# Altium PCB PCB1.PcbDoc (part 1 of 2)
Units mm, origin at the board's own origin, x right, y up, seen from the top; angles counter-clockwise.
Board outline 75.44 x 70.87 mm, 4 copper layers (Top Layer, Int1 (GND), Int2 (PWR), Bottom Layer), stack 1.586 mm thick; 102 components, 83 nets, 334 pads, 73 vias.
Unrouted connection lines stored in the file: 199.
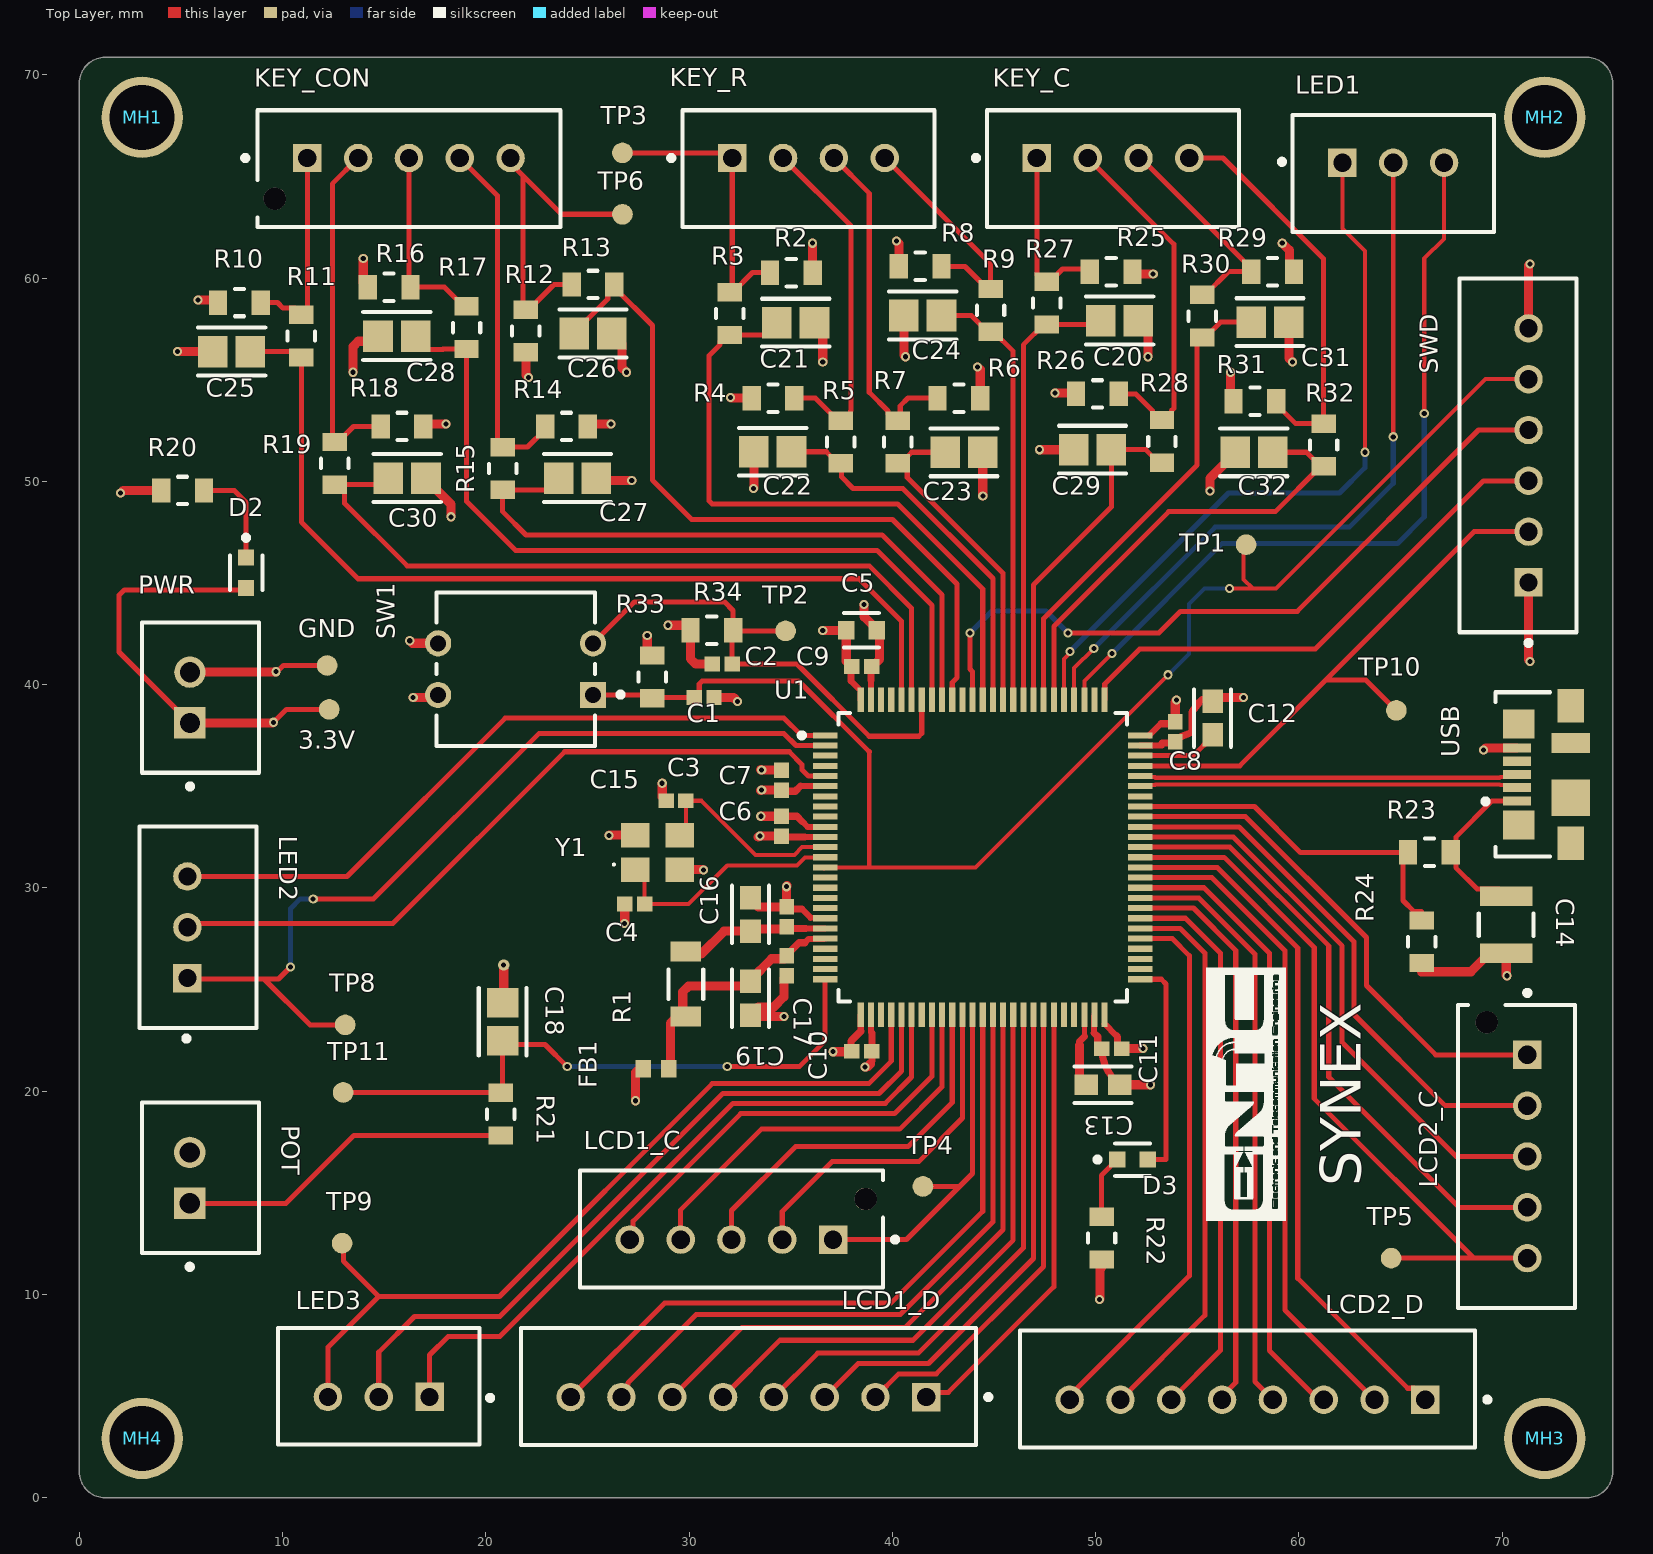
[diagram p0: Top Layer view]
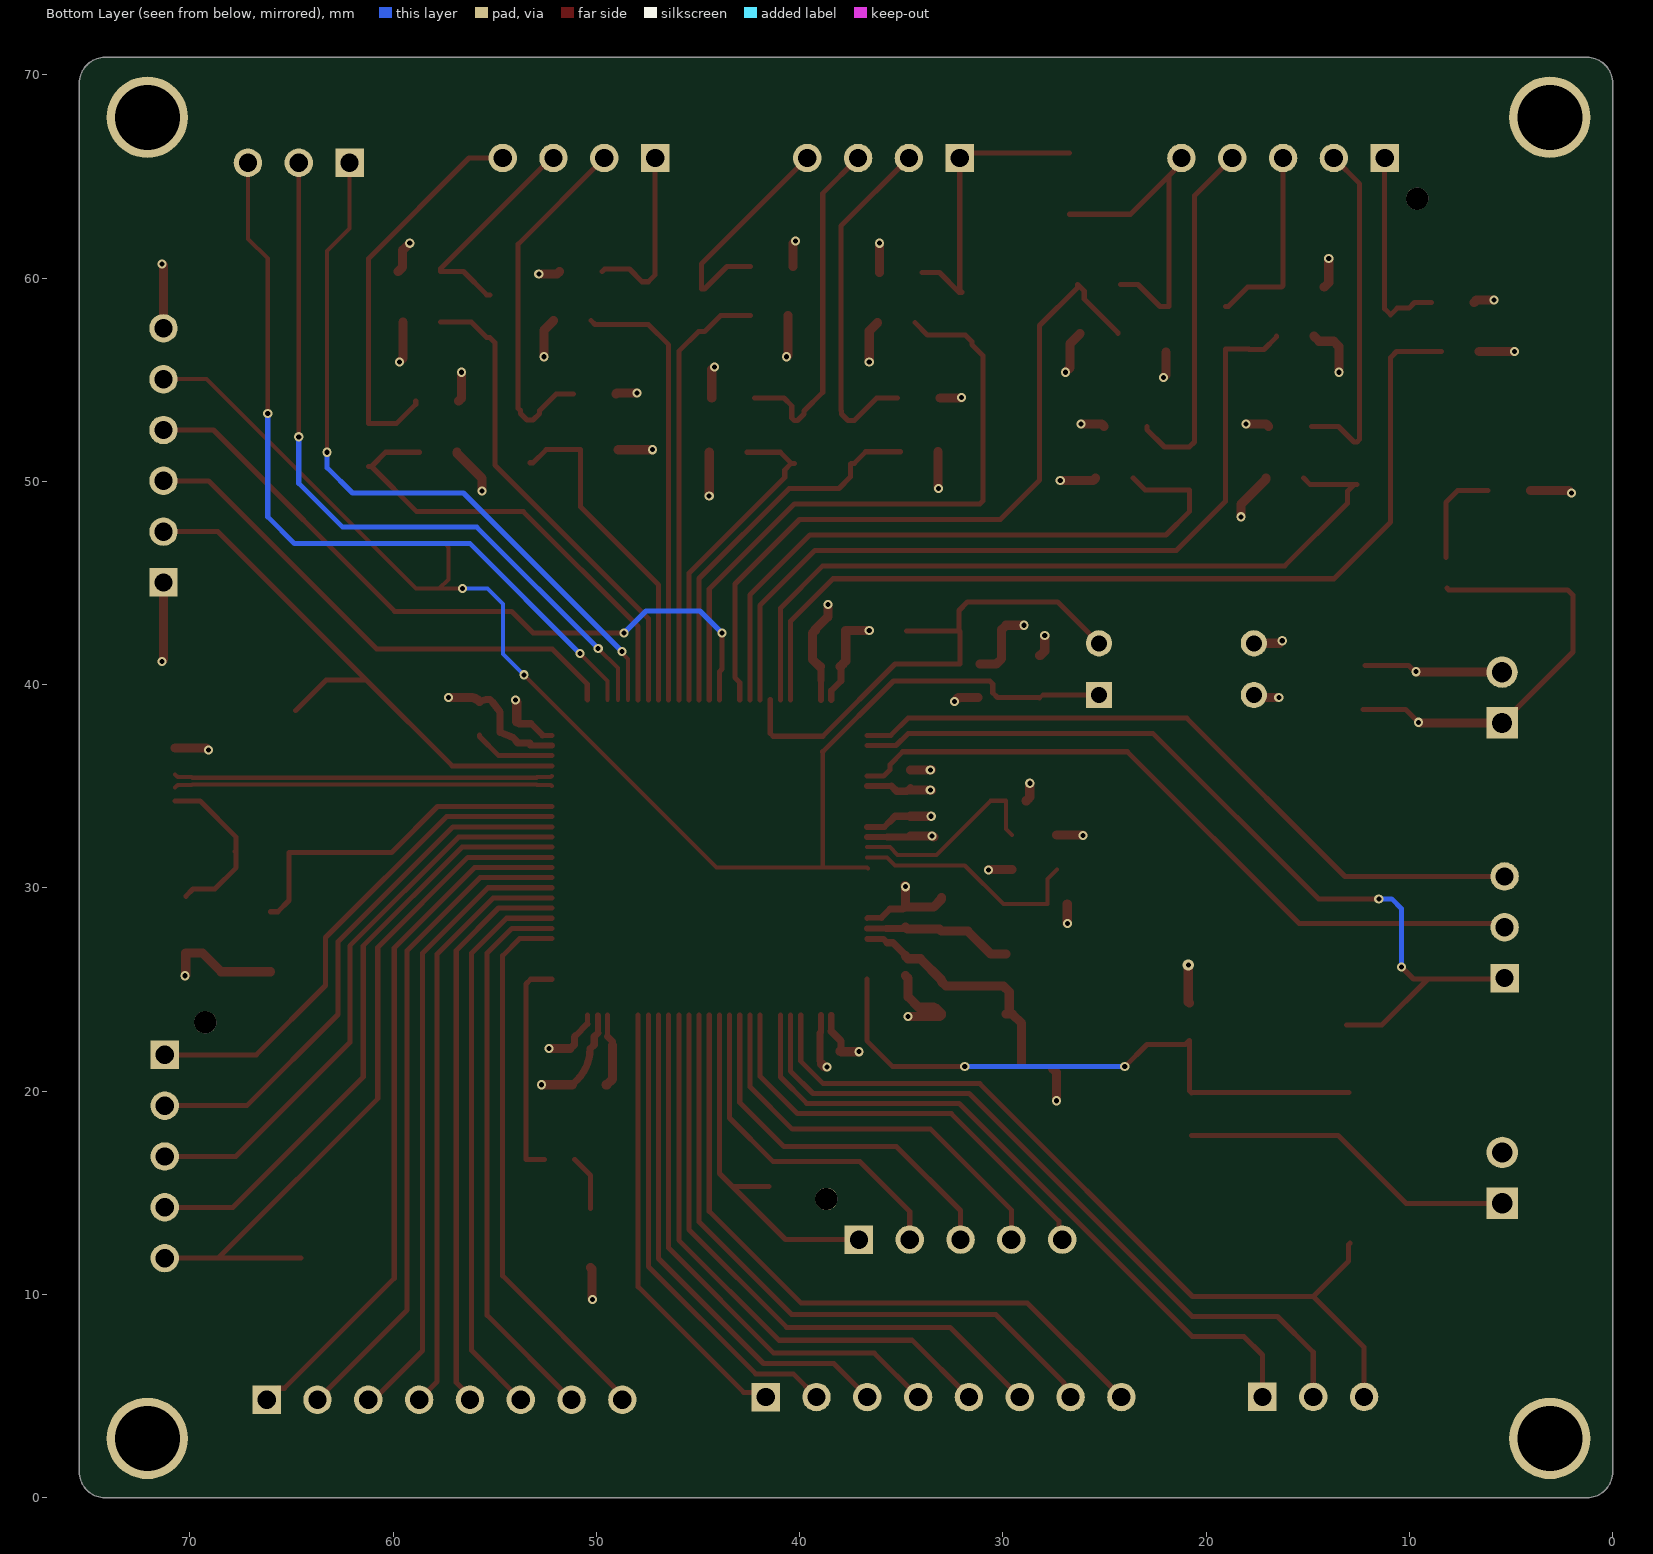
[diagram p1: Bottom Layer view, seen from below]
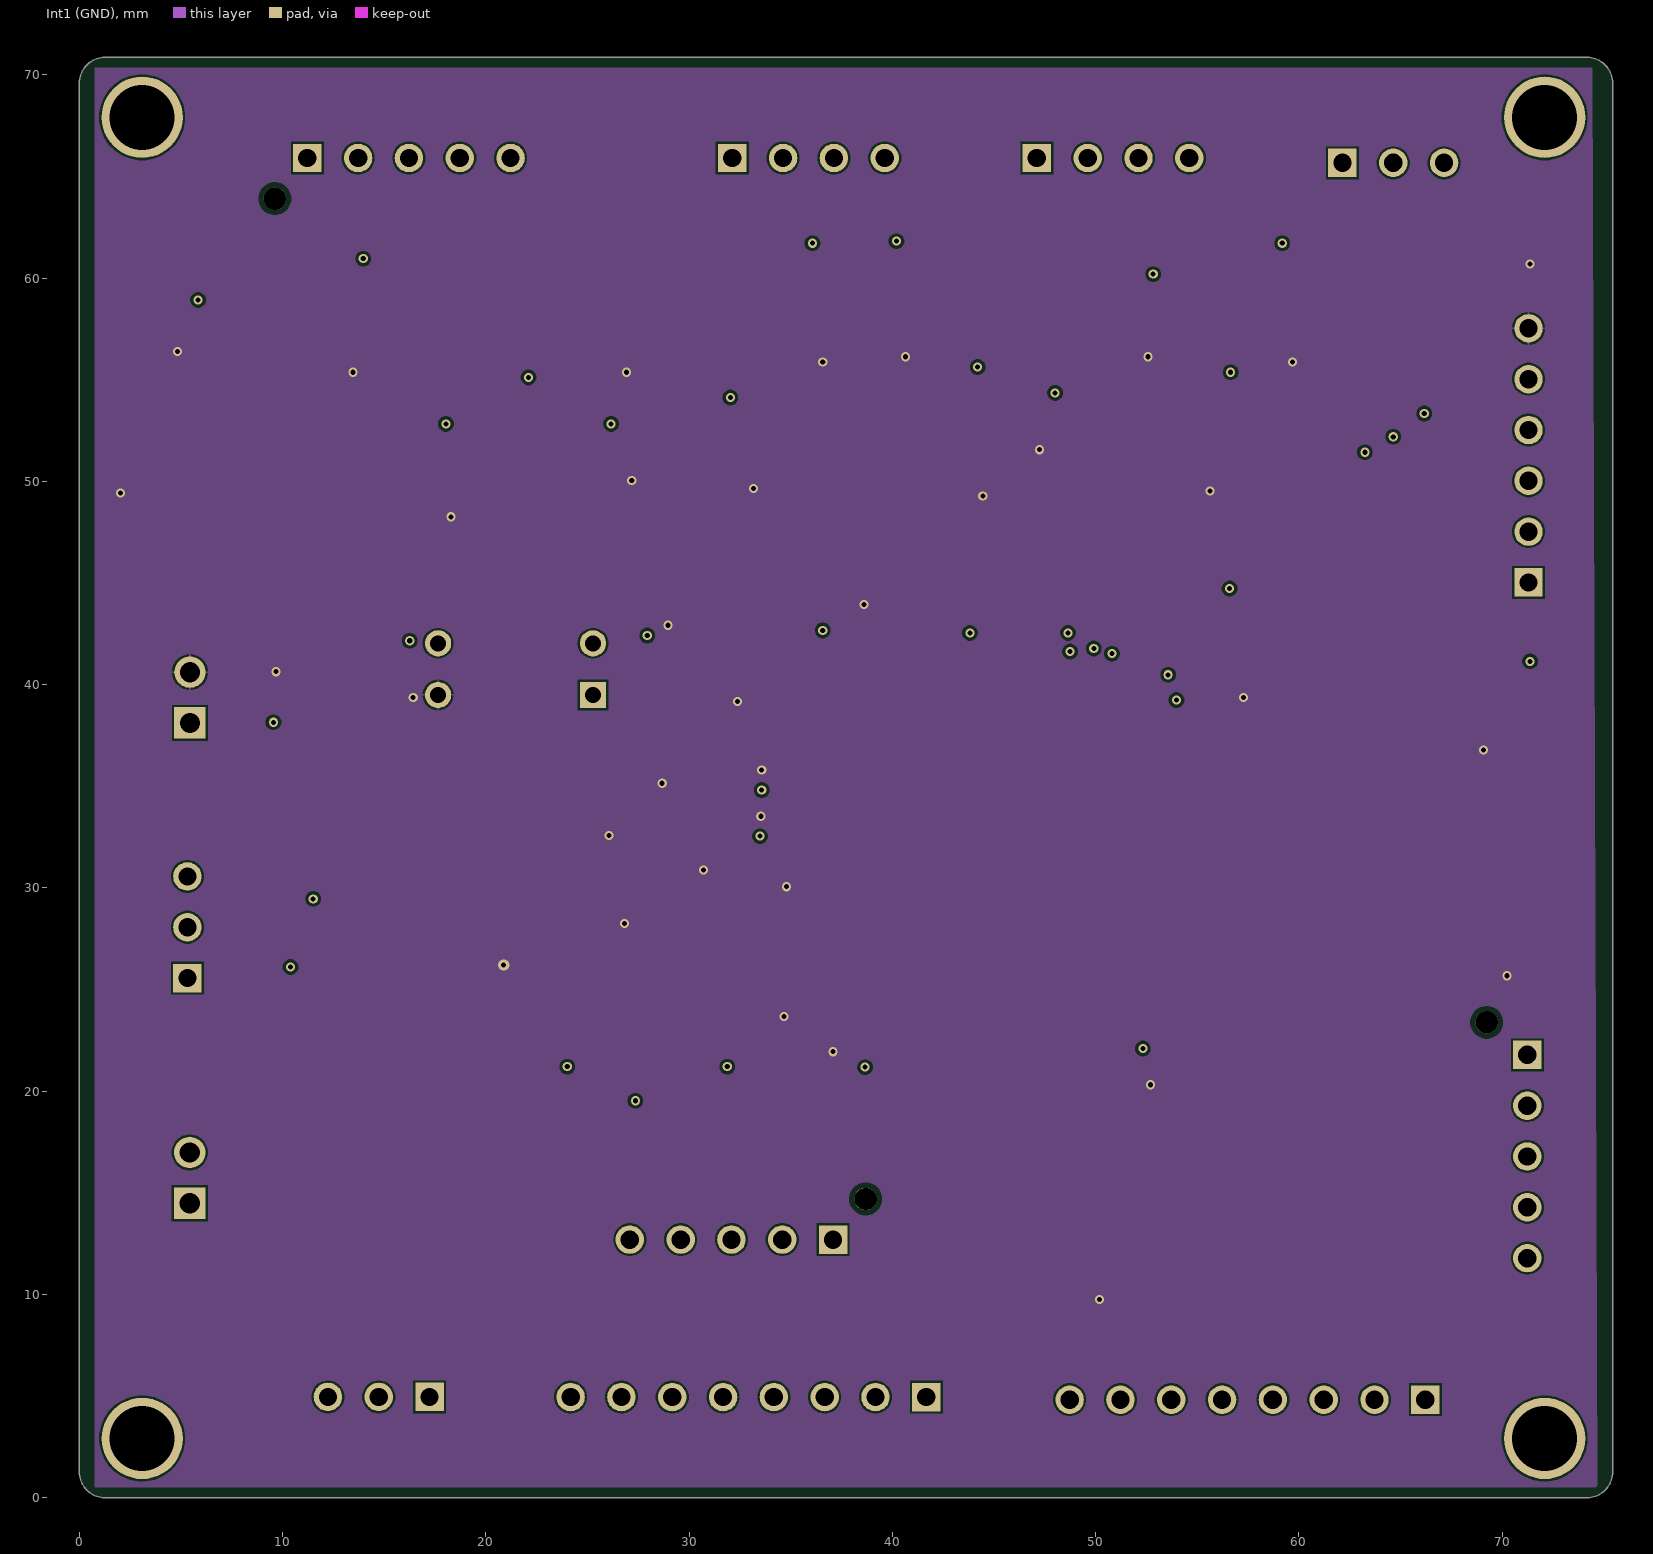
[diagram p2: Int1 (GND)]
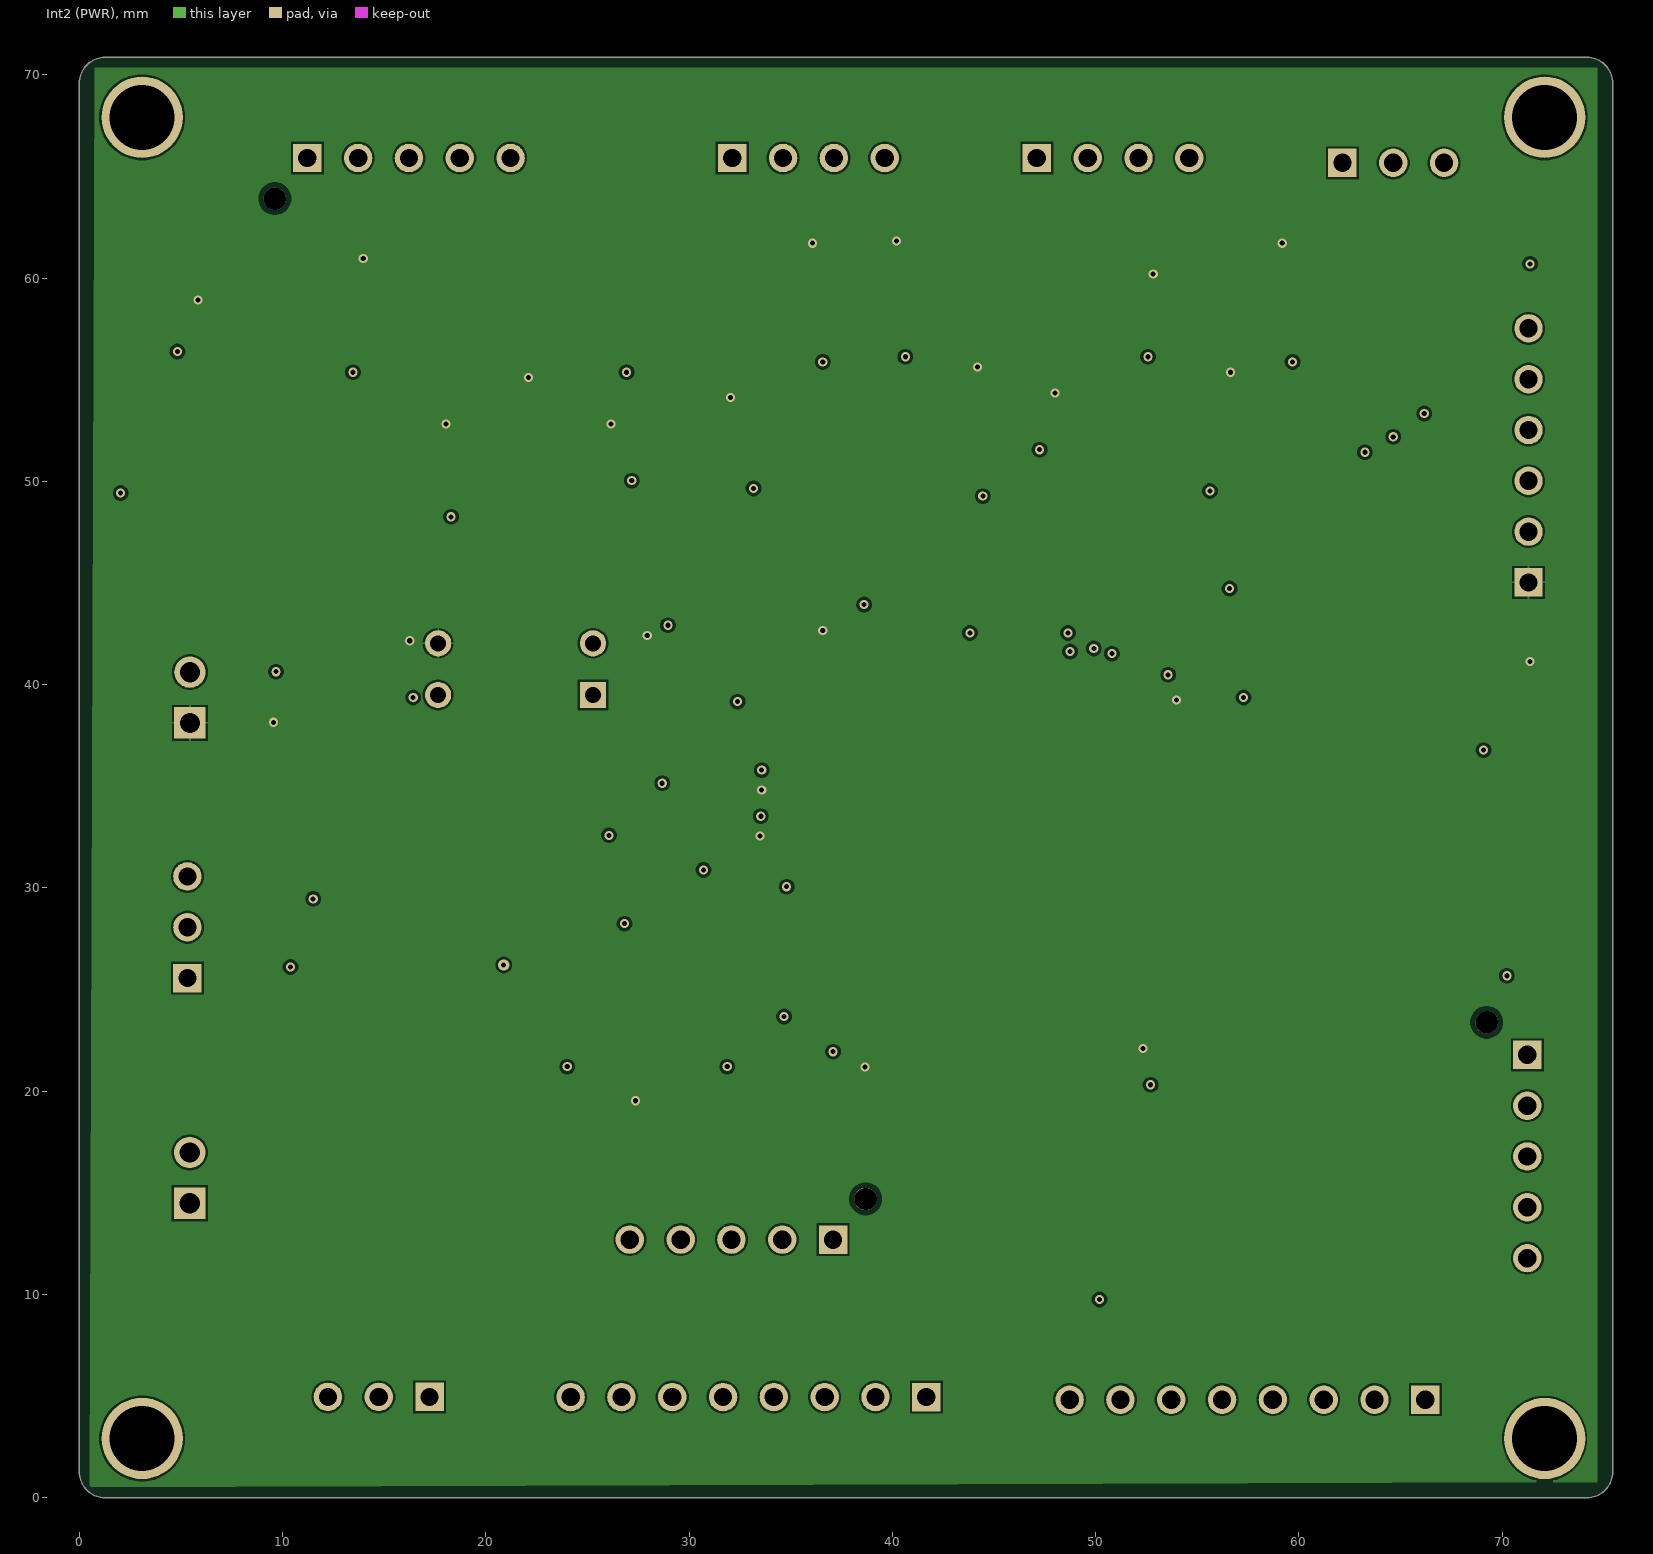
[diagram p3: Int2 (PWR)]
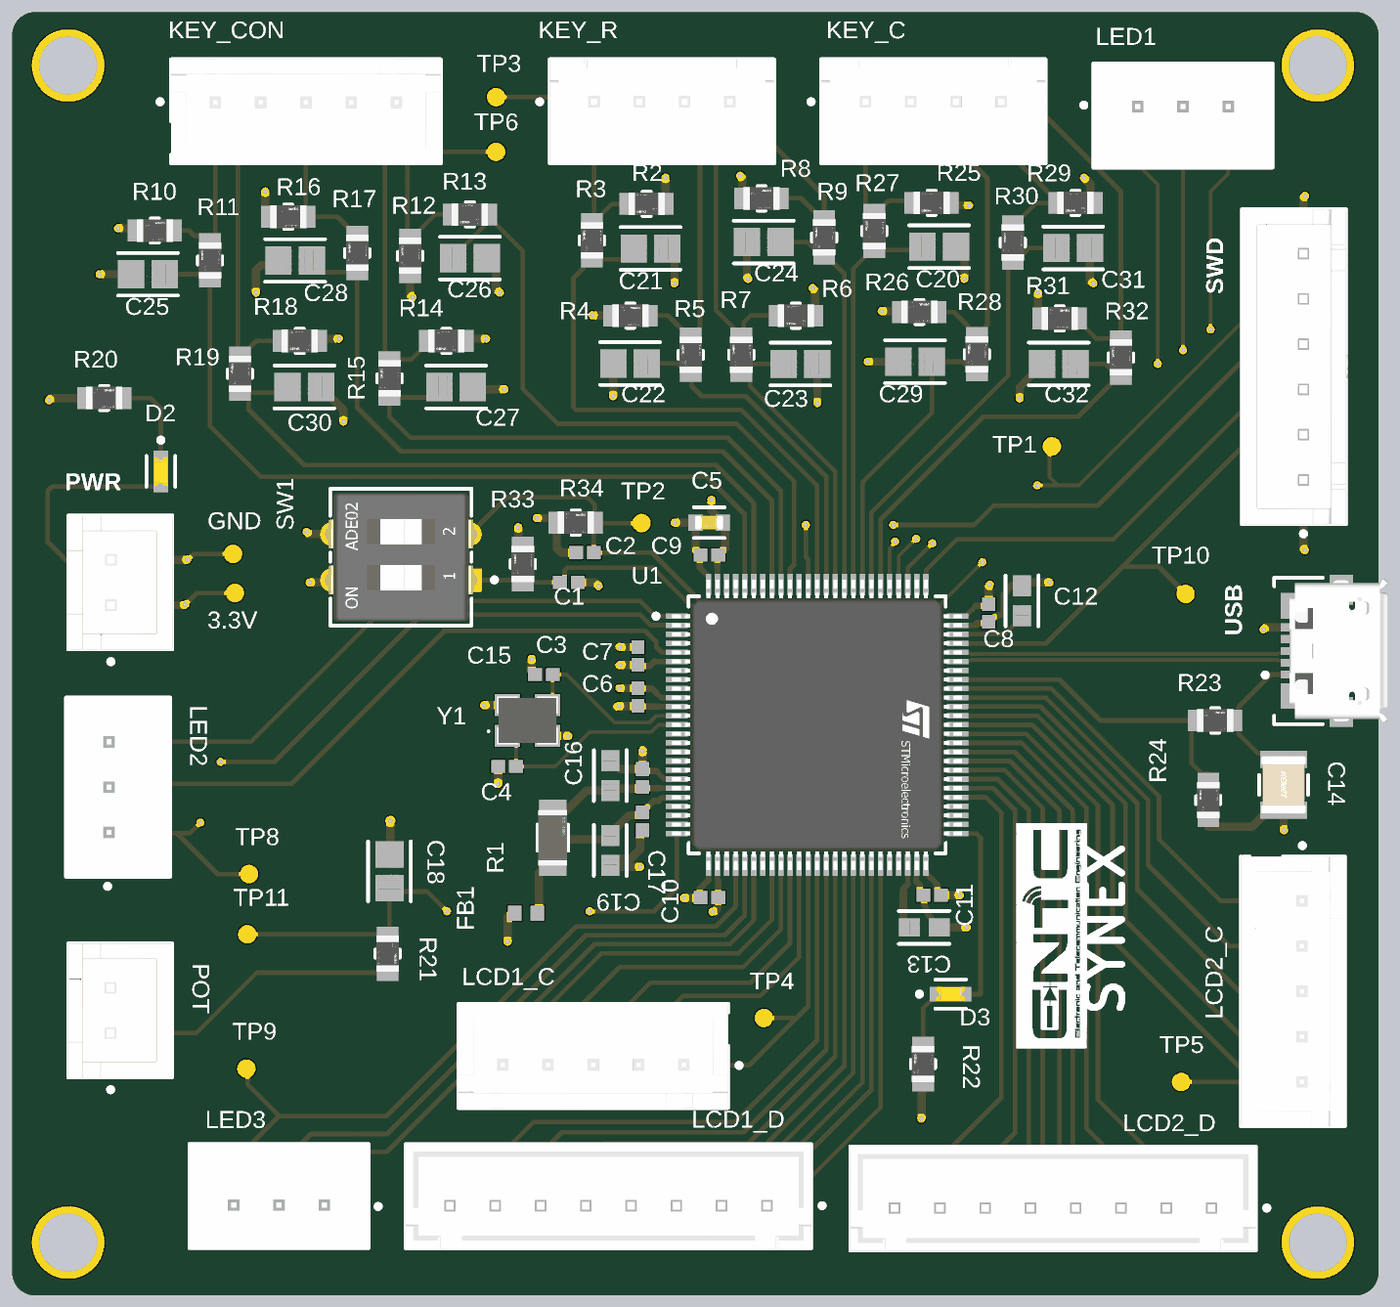
[diagram p4: 3D render of the assembled board from above, using the file's embedded part models]

## Layer stack, top to bottom
Top Solder: solder mask 0.0305, SM-001, Dk 3.8
Top Layer: signal copper 0.035
Dielectric 1: prepreg 0.2104, PP-7628, Dk 4.4
Int1 (GND): signal copper 0.0152
Dielectric 3: core 1.065, Core-039, Dk 4.6
Int2 (PWR): signal copper 0.0152
Dielectric 5: prepreg 0.2104, PP-7628, Dk 4.4
Bottom Layer: signal copper 0.035
Bottom Solder: solder mask 0.0305, SM-001, Dk 3.8

## Board outline
0,1.27 0,69.596 cw(c1.27,69.596) 1.27,70.866 74.168,70.866 cw(c74.168,69.596) 75.438,69.596 75.438,1.27 cw(c74.168,1.27) 74.168,0 1.27,0 cw(c1.27,1.27)

## Design rules (kind name [scope] priority, off if disabled: settings)
AssemblyTestpoint [All] p1: testpointundercomponent=TRUE minsize=2.54 maxsize=2.54 preferedsize=1.524 minholesize=0 maxholesize=1.016 preferedholesize=0 testpointgrid=0.05 usegrid=TRUE gridtolerance=0 allowsidebottom=TRUE minspacing=25
BoardOutlineClearance [All] p1: gap=0.2 ignorepadtopadclearanceinfootprint=FALSE
Clearance [All] p1: gap=0.102 ignorepadtopadclearanceinfootprint=FALSE except(0.127: Arc-Via Track-Via SMDPad-Via THPad-Via Via-Via Via-Fill Via-Poly Via-Region Via-Text; 0.25: Arc-Hole Track-Hole SMDPad-Hole THPad-Hole Via-Hole Fill-Hole Poly-Hole Region-Hole Text-Hole)
ComponentClearance [All] p1: gap=0.102 collisioncheckmode=3 verticalgap=0.102 showdistances=TRUE
DiffPairsRouting [All] p1: maxlimit=0.127 minlimit=0.127 mostfreqgap=0.127 toplayer_minwidth=0.2 toplayer_maxwidth=0.2 toplayer_prefwidth=0.2 midlayer1_minwidth=0.154 midlayer1_maxwidth=0.154 midlayer1_prefwidth=0.154 midlayer2_minwidth=0.154 midlayer2_maxwidth=0.154 midlayer2_prefwidth=0.154 bottomlayer_minwidth=0.2 bottomlayer_maxwidth=0.2 bottomlayer_prefwidth=0.2 impedanceprofiledriven=TRUE impedanceprofileid={82063DBE-4F28-4A8A-9398-9A70FBDED7CD} impedanceprofilevalue=90.000000 maxuncoupledlength=12.7
Height [All] p1: minheight=0 maxheight=1816.048 prefheight=12.7
HoleSize [All] p1: absolutevalues=TRUE maxlimit=6.3 minlimit=0.2 maxpercent=80.000 minpercent=20.000
HoleToHoleClearance [All] p1: gap=0.25 allowstackedmicrovias=FALSE
MinimumAnnularRing [All] p1: minimumring=0.076
MinimumSolderMaskSliver [All] p1: minsoldermaskwidth=0
PlaneClearance [All] p1: clearance=0.102
PlaneConnect PlaneConnectPowerPads [InPadClass('PowerPads')] p1: planeconnectstyle=Direct reliefexpansion=0.508 reliefentries=4 reliefconductorwidth=0.254 reliefairgap=0.254
PlaneConnect [All] p2: pad.planeconnectstyle=Relief pad.reliefexpansion=0.3 pad.reliefentries=4 pad.reliefconductorwidth=0.102 pad.reliefairgap=0.102 via.planeconnectstyle=Direct via.reliefexpansion=0.3 via.reliefentries=4 via.reliefconductorwidth=0.127 via.reliefairgap=0.127
PolygonConnect PolygonConnectPowerPads [All vs (InPadClass('PowerPads'))] p1: connectstyle=Direct reliefconductorwidth=0.254 reliefentries=4 polygonreliefangle="90 Angle" airgapwidth=0.254
PolygonConnect [All] p2: thpad.connectstyle=Relief thpad.reliefconductorwidth=0.102 thpad.reliefentries=4 thpad.polygonreliefangle="90 Angle" thpad.airgapwidth=0.102 smdpad.connectstyle=Relief smdpad.reliefconductorwidth=0.102 smdpad.reliefentries=4 smdpad.polygonreliefangle="90 Angle" smdpad.airgapwidth=0.102 via.connectstyle=Direct via.reliefconductorwidth=0.127 via.reliefentries=4 via.polygonreliefangle="90 Angle" via.airgapwidth=0.127
RoutingVias [All] p1: holewidth=0.25 width=0.45 viastyle="Through Hole" minholewidth=0.2 minwidth=0.45 maxholewidth=6.3 maxwidth=6.55
SilkToSilkClearance [All] p1: silktosilkclearance=0
SilkToSolderMaskClearance [IsPad] p1: minsilkscreentomaskgap=0.102 clearancetoexposedcopper=TRUE
SolderMaskExpansion [All] p1: expansion=0.075 istentingtop=FALSE
SupplyNets "Schematic Supply Nets_2" [InNet('GND')] p1: voltage=0.000
SupplyNets "Schematic Supply Nets_1" [InNet('+5V')] p2: voltage=0.000
SupplyNets "Schematic Supply Nets" [InNet('+3.3V')] p3: voltage=0.000
Width [All] p1: maxlimit=1816.048 minlimit=0.102 preferedwidth=0.25 midlayer1_prefwidth=0.102 midlayer2_prefwidth=0.102 minimp=50.000000 maximp=50.000000 favimp=50.000000
19 further rules are at their usual default settings.

## Classes and differential pairs
differential pair USBD: +USBD_P -USBD_N

## Components (designator, comment, footprint, x,y, rotation, side; value= is the part's Value field where it differs from the comment)
3.3V "TPAD6R" TP06R 12.294,38.786 r90 top
C1 "100nF" CAPC1050X55X23ML05T13 30.734,39.37 r180 top
C2 "100nF" CAPC1050X55X23ML05T13 31.623,41.021 r0 top
C3 "10pF" CAPC1050X55X23ML05T13 29.355,34.29 r180 top
C4 "10pF" CAPC1050X55X23ML05T13 27.323,29.21 r0 top
C5 "4.7uF" FP-CC0603-DA-MFG 38.481,42.672 r0 top value="4.7 uF"
C6 "100nF" CAPC1050X55X23ML05T13 34.544,33.038 r270 top
C7 "100nF" CAPC1050X55X23ML05T13 34.544,35.306 r270 top
C8 "100nF" CAPC1050X55X23ML05T13 53.915,37.686 r90 top
C9 "100nF" CAPC1050X55X23ML05T13 38.499,40.894 r180 top
C10 "100nF" CAPC1050X55X23ML05T13 38.499,21.971 r0 top
C11 "100nF" CAPC1050X55X23ML05T13 50.8,22.098 r0 top
C12 "2.2uF" FP-CL10-IPC_A 55.753,38.354 r90 top
C13 "2.2uF" FP-CL10-IPC_A 50.357,20.32 r0 top
C14 "2.2uF" FP-C1210C225K1RACAUTO-MFG 70.2,28.194 r270 top
C15 "100nF" CAPC1050X55X23ML05T13 34.798,28.575 r270 top
C16 "1uF" FP-CL10-IPC_A 33.02,28.702 r90 top
C17 "100nF" CAPC1050X55X23ML05T13 34.798,26.18 r90 top
C18 "100nF" FP-CL21-IPC_A 20.828,23.419 r90 top
C19 "1uF" FP-CL10-IPC_A 33.02,24.573 r270 top
C20 "100nF" FP-CL21-IPC_A 51.181,57.912 r0 top
C21 "100nF" FP-CL21-IPC_A 35.244,57.81 r0 top
C22 "100nF" FP-CL21-IPC_A 34.112,51.46 r180 top
C23 "100nF" FP-CL21-IPC_A 43.524,51.435 r0 top
C24 "100nF" FP-CL21-IPC_A 41.492,58.166 r180 top
C25 "100nF" FP-CL21-IPC_A 7.493,56.388 r180 top
C26 "100nF" FP-CL21-IPC_A 25.273,57.277 r0 top
C27 "100nF" FP-CL21-IPC_A 24.511,50.165 r0 top
C28 "100nF" FP-CL21-IPC_A 15.621,57.15 r180 top
C29 "100nF" FP-CL21-IPC_A 49.849,51.562 r180 top
C30 "100nF" FP-CL21-IPC_A 16.129,50.165 r0 top
C31 "100nF" FP-CL21-IPC_A 58.584,57.836 r0 top
C32 "100nF" FP-CL21-IPC_A 57.785,51.435 r180 top
D2 "LTST-C191GKT" FP-LTST-C191GKT-MFG 8.204,45.503 r270 top
D3 "LTST-C191GKT" FP-LTST-C191GKT-MFG 51.816,16.637 r0 top
FB1 "" RESC1609X55X30LL10T20 28.372,21.107 r0 top
GND "TPAD6R" TP06R 12.192,40.945 r90 top
KEY_C "B4B-XH-A(LF)(SN)" FP-B4B-XH-A_LF_SN-MFG 50.86,65.388 r180 top
KEY_CON "B5B-XH-AM(LF)(SN)" FP-B5B-XH-AM_LF_SN-MFG 16.216,65.388 r180 top
KEY_R "B4B-XH-A(LF)(SN)" FP-B4B-XH-A_LF_SN-MFG 35.874,65.388 r180 top
LCD1_C "B5B-XH-AM(LF)(SN)" FP-B5B-XH-AM_LF_SN-MFG 32.084,13.225 r0 top
LCD1_D "B8B-XH-A(LF)(SN)" FP-B8B-XH-A_LF_SN-MFG 32.92,5.478 r0 top
LCD2_C "B5B-XH-AM(LF)(SN)" FP-B5B-XH-AM_LF_SN-MFG 70.714,16.789 r90 top
LCD2_D "B8B-XH-A(LF)(SN)" FP-B8B-XH-A_LF_SN-MFG 57.471,5.351 r0 top
LED1 "B3B-XH-A(LF)(SN)" FP-B3B-XH-A_LF_SN-MFG 64.643,65.151 r0 top
LED2 "B3B-XH-A(LF)(SN)" FP-B3B-XH-A_LF_SN-MFG 5.842,28.067 r90 top
LED3 "B3B-XH-A(LF)(SN)" FP-B3B-XH-A_LF_SN-MFG 14.732,5.486 r180 top
MH1 "PTH" "Copy of PTH-M2D5X5"#1 3.09,67.916 r0 top
MH2 "PTH" "Copy of PTH-M2D5X5"#2 72.09,67.916 r0 top
MH3 "PTH" "Copy of PTH-M2D5X5"#3 72.09,2.916 r0 top
MH4 "PTH" "Copy of PTH-M2D5X5"#4 3.09,2.916 r0 top
POT "B2B-XH-A(LF)(SN)" FP-B2B-XH-A_LF_SN-MFG 5.958,15.737 r90 top
PWR "B2B-XH-A(LF)(SN)" FP-B2B-XH-A_LF_SN-MFG 5.969,39.37 r90 top
R1 "0Ω" FP-AC1206-MFG 29.845,25.273 r90 top value=267Ω
R2 "10kΩ" FP-SR0805-MFG 35.029,60.274 r180 top value=10KΩ
R3 "1kΩ" FP-SR0805-MFG 32.004,58.259 r90 top value=10KΩ
R4 "10kΩ" FP-SR0805-MFG 34.129,54.102 r0 top value=10KΩ
R5 "1kΩ" FP-SR0805-MFG 37.465,51.943 r90 top value=10KΩ
R6 "10kΩ" FP-SR0805-MFG 43.273,54.102 r180 top value=10KΩ
R7 "1kΩ" FP-SR0805-MFG 40.259,51.943 r90 top value=10KΩ
R8 "10kΩ" FP-SR0805-MFG 41.368,60.579 r0 top value=10KΩ
R9 "1kΩ" FP-SR0805-MFG 44.831,58.42 r90 top value=10KΩ
R10 "10kΩ" FP-SR0805-MFG 7.874,58.801 r0 top value=10KΩ
R11 "1kΩ" FP-SR0805-MFG 10.922,57.15 r90 top value=10KΩ
R12 "10kΩ" FP-SR0805-MFG 21.971,57.404 r90 top value=10KΩ
R13 "1kΩ" FP-SR0805-MFG 25.273,59.69 r180 top value=10KΩ
R14 "10kΩ" FP-SR0805-MFG 23.969,52.705 r180 top value=10KΩ
R15 "1kΩ" FP-SR0805-MFG 20.828,50.639 r90 top value=10KΩ
R16 "10kΩ" FP-SR0805-MFG 15.24,59.563 r0 top value=10KΩ
R17 "1kΩ" FP-SR0805-MFG 19.05,57.565 r90 top value=10KΩ
R18 "10kΩ" FP-SR0805-MFG 15.875,52.705 r180 top value=10KΩ
R19 "1kΩ" FP-SR0805-MFG 12.573,50.893 r90 top value=10KΩ
R20 "1kΩ" FP-SR0805-MFG 5.08,49.555 r0 top value=10KΩ
R21 "5.1kΩ" FP-SR0805-MFG 20.726,18.872 r270 top value=10KΩ
R22 "1kΩ" FP-SR0805-MFG 50.292,12.774 r90 top value=10KΩ
R23 "82kΩ" FP-SR0805-MFG 66.421,31.75 r0 top value=10KΩ
R24 "33kΩ" FP-SR0805-MFG 66.04,27.354 r90 top value=10KΩ
R25 "10kΩ" FP-SR0805-MFG 50.766,60.325 r180 top value=10KΩ
R26 "10kΩ" FP-SR0805-MFG 50.089,54.305 r0 top value=10KΩ
R27 "1kΩ" FP-SR0805-MFG 47.6,58.776 r90 top value=10KΩ
R28 "1kΩ" FP-SR0805-MFG 53.264,51.968 r90 top value=10KΩ
R29 "10kΩ" FP-SR0805-MFG 58.708,60.325 r180 top value=10KΩ
R30 "1kΩ" FP-SR0805-MFG 55.245,58.132 r90 top value=10KΩ
R31 "10kΩ" FP-SR0805-MFG 57.836,53.95 r0 top value=10KΩ
R32 "1kΩ" FP-SR0805-MFG 61.214,51.791 r90 top value=10KΩ
R33 "10kΩ" FP-SR0805-MFG 28.194,40.386 r90 top value=10KΩ
R34 "10kΩ" FP-SR0805-MFG 31.115,42.672 r0 top value=10KΩ
SW1 "1825057-1" FP-1825057-1-MFG 21.463,40.767 r90 top
SWD "B6B-XH-A(LF)(SN)" FP-B6B-XH-A_LF_SN-MFG 70.773,51.281 r90 top
TP1 "TPAD6R" TP06R 57.404,46.888 r90 top
TP2 "TPAD6R" TP06R 34.747,42.647 r90 top
TP3 "TPAD6R" TP06R 26.721,66.167 r0 top
TP4 "TPAD6R" TP06R 41.504,15.316 r0 top
TP5 "TPAD6R" TP06R 64.541,11.786 r0 top
TP6 "TPAD6R" TP06R 26.721,63.144 r0 top
TP8 "TPAD6R" TP06R 13.081,23.266 r90 top
TP9 "TPAD6R" TP06R 12.929,12.522 r0 top
TP10 "TPAD6R" TP06R 64.795,38.735 r90 top
TP11 "TPAD6R" TP06R 12.979,19.939 r90 top
U1 "STM32H743VIT6" FP-LQFP100-1L-MFG 44.445,31.509 r0 top
USB "47346-0001" FP-473460001-MFG 73.031,35.585 r90 top
Y1 "X322525MOB4SI" X322525MOB4SI 28.448,31.75 r0 top

## Footprints (in the part's own frame and the unit in brackets; to place one, negate y for a bottom-side part, rotate by r counter-clockwise, add the part's x,y. Pads: shape width x height; smd on the part's side, far side on the other; paste and mask are expansions set on the pad)
CAPC1050X55X23ML05T13 [mm] "Chip Capacitor, 2-Leads, Body 1.05x0.55mm, IPC Low Density"
  rect 0.76x0.72 smd: 1(-0.49,0) 2(0.49,0)
  body extent -0.53,-0.28 0.53,0.27, height 0.55
"Copy of PTH-M2D5X5"#1 [mm]
  round 4 hole 3.2: 1(0,0)
"Copy of PTH-M2D5X5"#2 [mm]
  round 4 hole 3.2: 4(0,0)
"Copy of PTH-M2D5X5"#3 [mm]
  round 4 hole 3.2: 3(0,0)
"Copy of PTH-M2D5X5"#4 [mm]
  round 4 hole 3.2: 2(0,0)
FP-1825057-1-MFG [mm]
  rect 1.29x1.29 hole 0.79 paste-2539.97 mask+0: 1(-1.27,-3.81)
  round 1.29 hole 0.79 paste-2539.97 mask+0: 2(1.27,-3.81) 3(1.27,3.81) 4(-1.27,3.81)
  silkscreen extent -3.78,-5.29 3.78,3.9, body extent -3.88,-4.55 3.88,4.55, height 0.25
FP-473460001-MFG [mm]
  rect 0.45x1.38 smd paste+0 mask+0: 1(-1.3,2.31) 2(-0.65,2.31) 3(0,2.31) 4(0.65,2.31) 5(1.3,2.31)
  rect 1.425x1.55 smd paste+0 mask+0: 6(-2.488,2.225) 7(2.488,2.225)
  rect 1.65x1.3 smd paste+0 mask+0: 8(-3.375,-0.35) 11(3.375,-0.35)
  rect 1.8x1.9 smd paste+0 mask+0: 9(-1.15,-0.35)
  rect 1x1.9 smd paste+0 mask+0: 10(1.55,-0.35)
  silkscreen extent -4.05,0.67 4.05,3.97, body extent -4.3,-2.48 4.3,3.45, height 0.25
FP-AC1206-MFG [mm]
  rect 1x1.5 smd paste+0 mask+0: 1(-1.6,0) 2(1.6,0)
  silkscreen extent -0.72,-0.85 0.72,0.85, body extent -2.2,-0.95 2.2,0.95, height 0.25
FP-B2B-XH-A_LF_SN-MFG [mm]
  rect 1.55x1.55 hole 1 paste-2539.97 mask+0: 1(-1.25,0.525)
  round 1.55 hole 1 paste-2539.97 mask+0: 2(1.25,0.525)
  silkscreen extent -4.5,-2.88 3.7,2.88, body extent -3.8,-2.98 3.8,2.98, height 0.25
FP-B3B-XH-A_LF_SN-MFG [mm]
  rect 1.4x1.4 hole 0.9 paste-2539.97 mask+0: 1(-2.5,0.525)
  round 1.4 hole 0.9 paste-2539.97 mask+0: 2(0,0.525) 3(2.5,0.525)
  silkscreen extent -5.6,-2.88 4.95,2.88, body extent -5.05,-2.98 5.05,2.98, height 0.25
FP-B4B-XH-A_LF_SN-MFG [mm]
  rect 1.4x1.4 hole 0.9 paste-2539.97 mask+0: 1(3.75,-0.525)
  round 1.4 hole 0.9 paste-2539.97 mask+0: 2(1.25,-0.525) 3(-1.25,-0.525) 4(-3.75,-0.525)
  silkscreen extent -6.2,-2.88 6.87,2.88, body extent -6.3,-2.98 6.3,2.98, height 0.25
FP-B5B-XH-AM_LF_SN-MFG [mm]
  rect 1.4x1.4 hole 0.9 paste-2539.97 mask+0: 1(5,-0.525)
  round 1.4 hole 0.9 paste-2539.97 mask+0: 2(2.5,-0.525) 3(0,-0.525) 4(-2.5,-0.525) 5(-5,-0.525)
  round 1.1 hole 1.1 unplated paste-2539.97 mask+0: ""(6.6,1.475)
  silkscreen extent -7.45,-2.88 8.17,2.88, body extent -7.55,-2.98 7.55,2.98, height 0.25
FP-B6B-XH-A_LF_SN-MFG [mm]
  rect 1.4x1.4 hole 0.9 paste-2539.97 mask+0: 1(-6.25,-0.525)
  round 1.4 hole 0.9 paste-2539.97 mask+0: 2(-3.75,-0.525) 3(-1.25,-0.525) 4(1.25,-0.525) 5(3.75,-0.525) 6(6.25,-0.525)
  silkscreen extent -9.35,-2.88 8.7,2.88, body extent -8.8,-2.98 8.8,2.98, height 0.25
FP-B8B-XH-A_LF_SN-MFG [mm]
  rect 1.4x1.4 hole 0.9 paste-2539.97 mask+0: 1(8.75,-0.525)
  round 1.4 hole 0.9 paste-2539.97 mask+0: 2(6.25,-0.525) 3(3.75,-0.525) 4(1.25,-0.525) 5(-1.25,-0.525) 6(-3.75,-0.525) 7(-6.25,-0.525) 8(-8.75,-0.525)
  silkscreen extent -11.2,-2.88 11.93,2.88, body extent -11.3,-2.98 11.3,2.98, height 0.25
FP-C1210C225K1RACAUTO-MFG [mm]
  rect 0.95x2.6 smd paste+0 mask+0: 1(-1.4,0) 2(1.4,0)
  silkscreen extent -0.55,-1.35 0.55,1.35, body extent -2,-1.45 2,1.45, height 0.25
FP-CC0603-DA-MFG [mm]
  rect 0.8x0.9 smd paste+0 mask+0: 1(-0.75,0) 2(0.75,0)
  silkscreen extent -0.85,-0.85 0.85,0.85, body extent -1.35,-0.75 1.35,0.75, height 0.25
FP-CL10-IPC_A [mm]
  rect 1.158x1.012 smd paste+0 mask+0: 1(-0.827,0) 2(0.827,0)
  silkscreen extent -1.41,-0.91 1.41,0.91, body extent -1.91,-1.01 1.91,1.01, height 0.25
FP-CL21-IPC_A [mm]
  rect 1.455x1.556 smd paste+0 mask+0: 1(-0.926,0) 2(0.926,0)
  silkscreen extent -1.65,-1.18 1.65,1.18, body extent -2.15,-1.28 2.15,1.28, height 0.25
FP-LQFP100-1L-MFG [mm]
  rect 1.2x0.3 smd paste+0 mask+0: 1(-7.75,6) 2(-7.75,5.5) 3(-7.75,5) 4(-7.75,4.5) 5(-7.75,4) 6(-7.75,3.5) 7(-7.75,3) 8(-7.75,2.5) 9(-7.75,2) 10(-7.75,1.5) 11(-7.75,1) 12(-7.75,0.5) 13(-7.75,0) 14(-7.75,-0.5) 15(-7.75,-1) 16(-7.75,-1.5) 17(-7.75,-2) 18(-7.75,-2.5) 19(-7.75,-3) 20(-7.75,-3.5) 21(-7.75,-4) 22(-7.75,-4.5) 23(-7.75,-5) 24(-7.75,-5.5) 25(-7.75,-6) 51(7.75,-6) 52(7.75,-5.5) 53(7.75,-5) 54(7.75,-4.5) 55(7.75,-4) 56(7.75,-3.5) 57(7.75,-3) 58(7.75,-2.5) 59(7.75,-2) 60(7.75,-1.5) 61(7.75,-1) 62(7.75,-0.5) 63(7.75,0) 64(7.75,0.5) 65(7.75,1) 66(7.75,1.5) 67(7.75,2) 68(7.75,2.5) 69(7.75,3) 70(7.75,3.5) 71(7.75,4) 72(7.75,4.5) 73(7.75,5) 74(7.75,5.5) 75(7.75,6)
  rect 0.3x1.2 smd paste+0 mask+0: 26(-6,-7.75) 27(-5.5,-7.75) 28(-5,-7.75) 29(-4.5,-7.75) 30(-4,-7.75) 31(-3.5,-7.75) 32(-3,-7.75) 33(-2.5,-7.75) 34(-2,-7.75) 35(-1.5,-7.75) 36(-1,-7.75) 37(-0.5,-7.75) 38(0,-7.75) 39(0.5,-7.75) 40(1,-7.75) 41(1.5,-7.75) 42(2,-7.75) 43(2.5,-7.75) 44(3,-7.75) 45(3.5,-7.75) 46(4,-7.75) 47(4.5,-7.75) 48(5,-7.75) 49(5.5,-7.75) 50(6,-7.75) 76(6,7.75) 77(5.5,7.75) 78(5,7.75) 79(4.5,7.75) 80(4,7.75) 81(3.5,7.75) 82(3,7.75) 83(2.5,7.75) 84(2,7.75) 85(1.5,7.75) 86(1,7.75) 87(0.5,7.75) 88(0,7.75) 89(-0.5,7.75) 90(-1,7.75) 91(-1.5,7.75) 92(-2,7.75) 93(-2.5,7.75) 94(-3,7.75) 95(-3.5,7.75) 96(-4,7.75) 97(-4.5,7.75) 98(-5,7.75) 99(-5.5,7.75) 100(-6,7.75)
  silkscreen extent -9.02,-7.1 7.1,7.1, body extent -8.45,-8.45 8.45,8.45, height 0.25
FP-LTST-C191GKT-MFG [mm]
  rect 0.8x0.8 smd paste+0 mask+0: 1(-0.75,0) 2(0.75,0)
  silkscreen extent -1.85,-0.8 0.85,0.8, body extent -1.25,-0.55 1.25,0.55, height 0.25
FP-SR0805-MFG [mm]
  rect 0.9x1.2 smd paste+0 mask+0: 1(-1.05,0) 2(1.05,0)
  silkscreen extent -0.23,-0.67 0.23,0.67, body extent -1.6,-0.77 1.6,0.77, height 0.25
RESC1609X55X30LL10T20 [mm] "Chip Resistor, 2-Leads, Body 1.60x0.85mm, IPC High Density"
  rect 0.75x0.85 smd: 1(-0.625,0) 2(0.625,0)
  body extent -0.85,-0.48 0.85,0.48, height 0.55
TP06R [mil] "Testpoint, round, d=0.6mm"
  round 40 smd paste-39.37: 1(0,0)
X322525MOB4SI [mm]
  rect 1.4x1.2 smd: 1(-1.1,-0.85) 2(1.1,-0.85) 3(1.1,0.85) 4(-1.1,0.85)
  silkscreen extent -2.2,-0.65 -2.1,-0.55, body extent -1.68,-1.33 1.68,1.33, height 0.9

## Part data
3.3V GND TP1 TP2 TP3 TP4 TP5 TP6 TP8 TP9 TP10 TP11: library part CMP-00028-00002-3, "0.6mm round", Pins=1
C1 C2 C7 C8 C9 C10 C11 C15 C17: library part CMP-2000-05439-1, "Chip Capacitor, 100 nF, +/- 10%, 16 V, -55 to 125 degC, 0402 (1005 Metric), RoHS, Tape and Reel", Capacitance=100000pF, Case Size/Dimension=0402, Dielectric=X7R, Manufacturer="Samsung Electro-Mechanics", Rated Voltage=16V, Tolerance (%)=±10%, Datasheet URL=https://datasheet.ciiva.com/29198/458718-da-01-en-vs-kondensator-0402-29198423.pdf, Datasheet Version=Nov-10, Manufacturer URL=http://www.samsungsem.com/global/index.jsp
C3 C4: library part CMP-2000-05439-1, "CL05C100JB5NNNC Chip Capacitor, 100 nF, +/- 10%, 16 V, -55 to 125 degC, 0402 (1005 Metric), RoHS, Tape and Reel", Capacitance=100000pF, Case Size/Dimension=0402, Dielectric=X7R, Manufacturer="Samsung Electro-Mechanics", Rated Voltage=16V, Tolerance (%)=±10%, Datasheet URL=https://datasheet.ciiva.com/29198/458718-da-01-en-vs-kondensator-0402-29198423.pdf, Datasheet Version=Nov-10, Manufacturer URL=http://www.samsungsem.com/global/index.jsp
C5: library part CMP-03422-001217-1, "CC0603KRX5R8BB475 CAP CER 4.7UF 25V X5R 0603", Capacitance="4.7 uF", Manufacturer=YAGEO, Manufacturer Part Number=CC0603KRX5R8BB475, Package=CC0603-DA, Temperature="-55°C to +125°C", Temperature Characteristic=X5R, Temperature Coefficient=15%, Temperature Range High=+125°C, Temperature Range Low=-55°C, Tolerance=0.1, Voltage="25 V", Automotive=No, Category=Cap, ComponentLink2Description=Datasheet, ComponentLink2URL=http://www.yageo.com/documents/recent/UPY-GPHC_X7R_6.3V-to-50V_18.pdf, Device Class L1="Passive Components", Device Class L2=Capacitors, Device Class L3="Ceramic Capacitors", Digikey Description="CAP CER 4.7UF 25V X5R 0603", Footprint Url=http://www.yageo.com/exep/pages/download/literatures/UPY-C_GEN_24.pdf, Height=0.9mm, Lead Free=Yes, Material=Ceramic, Octopart=https://octopart.com/cc0603krx5r8bb475-yageo-77825350, RoHS=TRUE, Voltage Rating="25 V"
C6: library part CMP-2000-05439-1, "CL05B104KO5NNNC Chip Capacitor, 100 nF, +/- 10%, 16 V, -55 to 125 degC, 0402 (1005 Metric), RoHS, Tape and Reel", Capacitance=100000pF, Case Size/Dimension=0402, Dielectric=X7R, Manufacturer="Samsung Electro-Mechanics", Rated Voltage=16V, Tolerance (%)=±10%, Datasheet URL=https://datasheet.ciiva.com/29198/458718-da-01-en-vs-kondensator-0402-29198423.pdf, Datasheet Version=Nov-10, Manufacturer URL=http://www.samsungsem.com/global/index.jsp
C12 C13: library part CMP-13271-000835-1, "CL10A225KO8NNNC Cap Ceramic 2.2uF 16V X5R ±10% Pad SMD 0603 +85°C T/R", Case Code (Imperial)=0603, Case Code (Metric)=1608, Dielectric=X5R, Max Operating Temperature=85°C, Min Operating Temperature=-55°C, Package Quantity=4000, Tolerance=10%, Voltage=16V, Capacitance=2.2uF, Case/Package=0603, Contact Plating=Tin, Depth=0.8mm, Height=0.8mm, Lead Free="Lead Free", Length=1.6mm, Material=Ceramic, Mount="Surface Mount", Packaging="Tape and Reel", Radiation Hardening=No, Thickness=0.035inch, Voltage Rating=16V, Voltage Rating (DC)=16V, Width=0.031inch
C14: library part CMP-03020-034647-1, "C1210C225K1RACAUTOCAP CER 2.2UF 100V X7R 1210", Case Code (Imperial)=1210, Case Code (Metric)=3225, Dielectric=X7R, Dielectric Material=Ceramic, Max Operating Temperature=125°C, Min Operating Temperature=-55°C, Ratings=AEC-Q200, Tolerance=10%, Voltage Rating=100V, Capacitance=2.2uF, Case/Package=1210, Length=0.126inch, Mount="Surface Mount", Packaging="Cut Tape", REACH SVHC="No SVHC", RoHS Compliant=Yes, Voltage Rating (DC)=100V, Width=0.098inch
C16 C19: library part CMP-13271-001457-1, "CL10A105KO8NNNC Cap Ceramic 1uF 16V X5R ±10% Pad SMD 0603 +85°C T/R", Case Code (Imperial)=0603, Case Code (Metric)=1608, Dielectric=X5R, Max Operating Temperature=85°C, Min Operating Temperature=-55°C, Package Quantity=1, Tolerance=10%, Voltage=16V, Capacitance=1uF, Case/Package=0603, Contact Plating=Tin, Depth=0.8mm, Height=0.8mm, Lead Free="Lead Free", Length=1.6mm, Material=Ceramic, Mount="Surface Mount", Packaging="Tape and Reel", Radiation Hardening=No, Thickness=0.035inch, Voltage Rating=16V, Voltage Rating (DC)=16V, Width=0.031inch
C18 C20 C21 C22 C23 C24 C25 C26 C27 C28 C29 C30 C31 C32: library part CMP-13271-000177-1, "CL21B104KCFWPNE CL21 Series 0805 100nF 100V ±10% Tolerance X7R Multilayer Ceramic Chip Capacitor", Case Code (Imperial)=0805, Case Code (Metric)=2012, Max Operating Temperature=125°C, Min Operating Temperature=-55°C, Ratings=AEC-Q200, Tolerance=10%, Voltage Rating=100V, Capacitance=100nF, Case/Package=0805, Features="Soft Termination", Length=0.079inch, Mount="Surface Mount", Packaging="Tape and Reel", Thickness=0.053inch, Width=0.049inch
D2 D3: library part CMP-22017-000029-1, "LED GREEN CLEAR CHIP SMD", Case Code (Imperial)=0603, Case Code (Metric)=1608, Color=Green, Forward Current=30mA, Forward Voltage=2.1V, Lens Color=Colorless, Max Operating Temperature=85°C, Min Operating Temperature=-55°C, Package Quantity=1, Power Dissipation=100mW, Reverse Voltage=5V, Test Current=20mA, Case/Package=0603, Depth=0.8mm, Dominant Wavelength=569nm, Height=0.55mm, Illumination Color=Green, Lead Free="Lead Free", Length=1.6mm, Lens Style=Clear, Lens Transparency=Clear, Luminous Intensity=12mcd, Mount="Surface Mount", Number of Elements=1, Number of LEDs=1, Number of Pins=2, Packaging="Tape and Reel", Power Rating=100mW, Radiation Hardening=No, Viewing Angle=130°, Wavelength=565nm, Width=0.8mm
FB1: library part CMP-2000-03677-1, "1206W4F0000T5E", Manufacturer="Vishay Dale", Part Number=TNPU0603100RBZEN00
KEY_C KEY_R: library part CMP-17439-000250-1, "CONN HEADER VERT 4POS 2.5MM", Color=Natural, Contact Resistance=20mR, Current Rating=3A, Flammability Rating="UL94 V-0", Housing Color=White, Insulation Resistance=1GR, Max Operating Temperature=85°C, Max Voltage Rating (AC)=250V, Min Operating Temperature=-25°C, Package Quantity=500, Connector Type=Header, Contact Finish - Mating=TIN, Contact Material=Brass, Contact Plating=Tin, Contact Shape=Square, Contact Type="Male Pin", Depth=5.75mm, Fastening Type=Detent, Gender=Male, Housing Material=Polyamide, Insulation Color=Natural, Insulation Material=Nylon, Lead Free="Lead Free", Lead Pitch=2.5mm, Length=12.4mm, Mated Stacking Heights=9.8mm, Material=Polyamide, Max Current Rating=3A, Max Voltage Rating (DC)=250V, Mount="Through Hole", Number of Contacts=4, Number of Positions=4, Number of Rows=1, Orientation=Straight, Packaging=Bulk, Pitch=2.5mm, REACH SVHC="No SVHC", Series=XH, Termination=Solder, Voltage Rating=250V, Voltage Rating (AC)=250V, Wire/Cable Gauge=22AWG
KEY_CON LCD1_C LCD2_C: library part CMP-17439-000304-1, "CONN HEADER VERT 5POS 2.5MM", Color=Green, Contact Resistance=20mR, Flammability Rating="UL94 V-0", Housing Color=White, Insulation Color=Natural, Max Current Rating=3A, Max Operating Temperature=85°C, Max Voltage Rating (AC)=250V, Min Operating Temperature=-25°C, Connector Type=Header, Contact Finish - Mating=TIN, Contact Material=Brass, Contact Plating=Copper, Contact Shape=Square, Contact Type="Male Pin", Depth=5.75mm, Fastening Type=Detent, Housing Material=Polyamide, Insulation Material=Nylon, Lead Free="Lead Free", Length=14.9mm, Mated Stacking Heights=9.8mm, Mount="Through Hole", Number of Positions=5, Number of Rows=1, Orientation=Straight, Packaging=Bulk, Pitch=2.5mm, Series=XH, Termination=Solder, Voltage Rating=250V
LCD1_D LCD2_D: library part CMP-17438-000015-1, "CONN HEADER VERT 8POS 2.5MM", Color=Natural, Contact Resistance=20mR, Current Rating=3A, Housing Color=White, Insulation Resistance=1GR, Max Operating Temperature=85°C, Max Voltage Rating (AC)=250V, Min Operating Temperature=-25°C, Connector Type="Male Pin", Contact Material=Brass, Contact Plating=Tin, Contact Type="Male Pin", Depth=5.75mm, Fastening Type=Detent, Housing Material=Polyamide, Lead Free="Lead Free", Lead Pitch=2.5mm, Length=22.4mm, Max Current Rating=3A, Mount="Through Hole", Number of Contacts=8, Number of Positions=8, Number of Rows=1, Orientation=Straight, Packaging=Bulk, Pitch=2.5mm, REACH SVHC="No SVHC", Series=XH, Termination=Press-Fit, Voltage Rating=250V, Voltage Rating (AC)=250V, Wire/Cable Gauge=22AWG
LED1 LED2 LED3: library part CMP-17439-000014-3, "CONN HEADER VERT 3POS 2.5MM", Color=Natural, Contact Resistance=20mR, Current Rating=3A, Flammability Rating="UL94 V-0", Housing Color=White, Insulation Resistance=1GR, Max Operating Temperature=85°C, Max Voltage Rating (AC)=250V, Min Operating Temperature=-25°C, Connector Type=Header, Contact Finish - Mating=TIN, Contact Material=Brass, Contact Plating=Tin, Contact Shape=Square, Contact Type="Male Pin", Depth=5.75mm, Fastening Type=Detent, Gender=Male, Housing Material=Polyamide, Insulation Color=Natural, Insulation Material=Nylon, Lead Free="Lead Free", Lead Pitch=2.5mm, Length=9.9mm, Max Current Rating=3A, Max Voltage Rating (DC)=250V, Mount="Through Hole", Number of Contacts=3, Number of Positions=3, Number of Rows=1, Orientation=Straight, Packaging=Bulk, Pitch=2.5mm, REACH SVHC="No SVHC", Series=XH, Termination=Solder, Voltage Rating=250V, Voltage Rating (AC)=250V, Wire/Cable Gauge=22AWG
MH1 MH2 MH3 MH4: library part CMP-00028-00010-1, "4mm, 3.2mm", Pins=1
POT PWR: library part CMP-2000-05888-3, "CONN HEADER VERT 2POS 2.5MM", Color=Natural, Contact Resistance=20mR, Current Rating=3A, Housing Color=White, Insulation Resistance=1GR, Max Operating Temperature=85°C, Max Voltage Rating (AC)=250V, Min Operating Temperature=-25°C, Connector Type="Male Pin", Contact Material=Brass, Contact Plating=Tin, Contact Type="Male Pin", Depth=5.75mm, Fastening Type=Detent, Housing Material=Polyamide, Lead Free="Lead Free", Lead Pitch=2.5mm, Length=7.4mm, Max Current Rating=3A, Max Voltage Rating (DC)=250V, Mount="Through Hole", Number of Contacts=2, Number of Positions=2, Number of Rows=1, Orientation=Straight, Packaging=Bulk, Pitch=2.5mm, REACH SVHC="No SVHC", Series=XH, Termination=Solder, Voltage Rating=250V, Voltage Rating (AC)=250V, Wire/Cable Gauge=22AWG
R1: library part CMP-03412-025373-1, "1206W4F0000T5E", Manufacturer=Yageo, Manufacturer Part Number=AC1206FR-07267RL, Package=AC1206, Power Rating=0.25W, Resistance=267Ω, Temperature="-55°C to +155°C", Temperature Range High=+155°C, Temperature Range Low=-55°C, Tolerance=0.01, Voltage Rating=200V, Automotive=Yes, Automotive Grade="Grade 0", Category=Res, ComponentLink2Description=Datasheet, ComponentLink2URL=http://www.yageo.com/NewPortal/yageodocoutput?fileName=/pdf/R-Chip/PYu-AC_51_RoHS_L_6.pdf, Composition="Thick Film", Device Class L1="Passive Components", Device Class L2=Resistors, Device Class L3="Chip SMD Resistors", Digikey Description="RES SMD 267 OHM 1% 1/4W 1206", Footprint Url=http://www.yageo.com/exep/pages/download/literatures/PYu-R_Mount_10.pdf, Height=0.65mm, Ipc Land Pattern Name=RESC310160X55, Lead Free=Yes, Octopart=https://octopart.com/ac1206fr-07267rl-yageo-71368055, RoHS=TRUE, Series=AC
R2 R4 R6 R8 R10 R12 R14 R16 R18 R25 R26 R29 R31 R33 R34: library part CMP-03412-005404-1, "RES SMD 0805 1/2W 1% 10K OHM", Manufacturer=Yageo, Manufacturer Part Number=SR0805FR-4710KL, Package=SR0805, Power Rating=0.5W, Resistance=10KΩ, Temperature="-55°C to +155°C", Temperature Range High=+155°C, Temperature Range Low=-55°C, Tolerance=0.01, Voltage Rating=150V, Automotive=Yes, Automotive Grade="Grade 0", Category=Res, ComponentLink2Description=Datasheet, ComponentLink2URL=http://www.yageo.com/documents/recent/PYu-SR_D_F%20tol_RoHS_L_3.pdf, Composition="Thick Film", Device Class L1="Passive Components", Device Class L2=Resistors, Device Class L3="Chip SMD Resistors", Digikey Description="RES SMD 0805 1/2W 1% 10K OHM", Footprint Url=http://www.yageo.com/exep/pages/download/literatures/PYu-R_Mount_10.pdf, Height=0.6mm, Ipc Land Pattern Name=RESC200125X50, Lead Free=Yes, Octopart=https://octopart.com/sr0805fr-4710kl-yageo-91478094, RoHS=TRUE, Series=SR
R3 R5 R7 R9 R11 R13 R15 R17 R19 R20 R22 R27 R28 R30 R32: library part CMP-03412-005404-1, "RMC08051K5%N", Manufacturer=Yageo, Manufacturer Part Number=SR0805FR-4710KL, Package=SR0805, Power Rating=0.5W, Resistance=10KΩ, Temperature="-55°C to +155°C", Temperature Range High=+155°C, Temperature Range Low=-55°C, Tolerance=0.01, Voltage Rating=150V, Automotive=Yes, Automotive Grade="Grade 0", Category=Res, ComponentLink2Description=Datasheet, ComponentLink2URL=http://www.yageo.com/documents/recent/PYu-SR_D_F%20tol_RoHS_L_3.pdf, Composition="Thick Film", Device Class L1="Passive Components", Device Class L2=Resistors, Device Class L3="Chip SMD Resistors", Digikey Description="RES SMD 0805 1/2W 1% 10K OHM", Footprint Url=http://www.yageo.com/exep/pages/download/literatures/PYu-R_Mount_10.pdf, Height=0.6mm, Ipc Land Pattern Name=RESC200125X50, Lead Free=Yes, Octopart=https://octopart.com/sr0805fr-4710kl-yageo-91478094, RoHS=TRUE, Series=SR
R21: library part CMP-03412-005404-1, "0805W8F1501T5E", Manufacturer=Yageo, Manufacturer Part Number=SR0805FR-4710KL, Package=SR0805, Power Rating=0.5W, Resistance=10KΩ, Temperature="-55°C to +155°C", Temperature Range High=+155°C, Temperature Range Low=-55°C, Tolerance=0.01, Voltage Rating=150V, Automotive=Yes, Automotive Grade="Grade 0", Category=Res, ComponentLink2Description=Datasheet, ComponentLink2URL=http://www.yageo.com/documents/recent/PYu-SR_D_F%20tol_RoHS_L_3.pdf, Composition="Thick Film", Device Class L1="Passive Components", Device Class L2=Resistors, Device Class L3="Chip SMD Resistors", Digikey Description="RES SMD 0805 1/2W 1% 10K OHM", Footprint Url=http://www.yageo.com/exep/pages/download/literatures/PYu-R_Mount_10.pdf, Height=0.6mm, Ipc Land Pattern Name=RESC200125X50, Lead Free=Yes, Octopart=https://octopart.com/sr0805fr-4710kl-yageo-91478094, RoHS=TRUE, Series=SR
R23: library part CMP-03412-005404-1, "0805W8F8202T5E", Manufacturer=Yageo, Manufacturer Part Number=SR0805FR-4710KL, Package=SR0805, Power Rating=0.5W, Resistance=10KΩ, Temperature="-55°C to +155°C", Temperature Range High=+155°C, Temperature Range Low=-55°C, Tolerance=0.01, Voltage Rating=150V, Automotive=Yes, Automotive Grade="Grade 0", Category=Res, ComponentLink2Description=Datasheet, ComponentLink2URL=http://www.yageo.com/documents/recent/PYu-SR_D_F%20tol_RoHS_L_3.pdf, Composition="Thick Film", Device Class L1="Passive Components", Device Class L2=Resistors, Device Class L3="Chip SMD Resistors", Digikey Description="RES SMD 0805 1/2W 1% 10K OHM", Footprint Url=http://www.yageo.com/exep/pages/download/literatures/PYu-R_Mount_10.pdf, Height=0.6mm, Ipc Land Pattern Name=RESC200125X50, Lead Free=Yes, Octopart=https://octopart.com/sr0805fr-4710kl-yageo-91478094, RoHS=TRUE, Series=SR
R24: library part CMP-03412-005404-1, "0805W8F3302T5E", Manufacturer=Yageo, Manufacturer Part Number=SR0805FR-4710KL, Package=SR0805, Power Rating=0.5W, Resistance=10KΩ, Temperature="-55°C to +155°C", Temperature Range High=+155°C, Temperature Range Low=-55°C, Tolerance=0.01, Voltage Rating=150V, Automotive=Yes, Automotive Grade="Grade 0", Category=Res, ComponentLink2Description=Datasheet, ComponentLink2URL=http://www.yageo.com/documents/recent/PYu-SR_D_F%20tol_RoHS_L_3.pdf, Composition="Thick Film", Device Class L1="Passive Components", Device Class L2=Resistors, Device Class L3="Chip SMD Resistors", Digikey Description="RES SMD 0805 1/2W 1% 10K OHM", Footprint Url=http://www.yageo.com/exep/pages/download/literatures/PYu-R_Mount_10.pdf, Height=0.6mm, Ipc Land Pattern Name=RESC200125X50, Lead Free=Yes, Octopart=https://octopart.com/sr0805fr-4710kl-yageo-91478094, RoHS=TRUE, Series=SR
SW1: library part CMP-03400-000012-1, "SWITCH SLIDE DIP SPST 100MA 24V", Contact Current Rating=100mA, Contact Resistance=50mΩ, Manufacturer="TE Connectivity", Temperature="-30°C to +85°C", Temperature Range High=+85°C, Temperature Range Low=-30°C, Voltage Rating Dc=24V, Automotive=No, Category=Switch, ComponentLink2Description=Datasheet, ComponentLink2URL=https://www.te.com/commerce/DocumentDelivery/DDEController?Action=srchrtrv&DocNm=1825057&DocType=Customer+Drawing&DocLang=English, Device Class L1=Electromechanical, Device Class L2=Switches, Device Class L3="DIP Switches", Digikey Description="SWITCH SLIDE DIP SPST 100MA 24V", Electromechanical Life=1000Cycles, Height=6.15mm, Lead Free=Yes, Manufacturer Part Number=1825057-1, Mount="Through Hole", Number Of Circuits=2, Octopart=https://octopart.com/1825057-1-te+connectivity-46507313, Package=1825057-1, RoHS=TRUE, Standoff Height=1.3mm, Throw Configuration=SPST
SWD: library part CMP-17439-000076-1, "CONN HEADER VERT 6POS 2.5MM"
U1: library part CMP-12105-000050-1, "IC MCU 32BIT 2MB FLASH 100LQFP", Ambient Temperature Range High=+85°C, Ambient Temperature Range Low=-40°C, Frequency=480MHz, Manufacturer=STMicroelectronics, Max Junction Temp=+125°C, Max Supply Voltage=3.6V, Min Supply Voltage=1.71V, Package=LQFP100-1L, Temperature="-40°C to +125°C", Automotive=No, Category=IC, ComponentLink2Description=Datasheet, ComponentLink2URL=https://www.st.com/resource/en/datasheet/stm32h743vi.pdf, Core Architecture="Arm Cortex-M7", Data Bus Width=32bits, Device Class L1="Integrated Circuits (ICs)", Device Class L2="Embedded Processors and Controllers", Device Class L3=Microcontrollers, Digikey Description="IC MCU 32BIT 2MB FLASH 100LQFP", Height=1.6mm, Interface=I2C,SPI,UART,USART,USB,LIN,IrDA,Ethernet,I2S,Other, Ipc Land Pattern Name=QFP50P1600X1600X160-100, Lead Free=Yes, Manufacturer Part Number=STM32H743VIT6, Memory Size=2MBytes, Memory Type=FLASH, Number Of A/D Converters=3, Number Of Adc Channels=36, Number Of Cores=1, Number Of Ethernet Channels=1, Number Of I2C Channels=4, Number Of I/Os=82, Number Of Pwm Channels=42, Number Of Spi Channels=6, Number Of Timers/Counters=20, Number Of Uart Channels=9, Number Of Usb Channels=2, Octopart=https://octopart.com/stm32h743vit6-stmicroelectronics-76372527, Ram Size=1060KBytes, RoHS=TRUE, Standoff Height=0.05mm, Temperature Range High=+125°C, Temperature Range Low=-40°C
USB: library part CMP-002-00071-1, "Micro-USB B Receptacle with Flange, Bottom Mount, Surface Mount, Lead-Free", Max Operating Temperature=85°C, Min Operating Temperature=-30°C, Voltage Rating=30V, Connector Type="Receptacle, USB", Gender=Female, Mounting Technology="Surface Mount", Pins=6
Y1: "Crystal or Oscillator", Manufacturer_Name="Yangxing Tech", Datasheet Link=https://datasheet.lcsc.com/szlcsc/Yangxing-Tech-X322525MOB4SI_C9006.pdf, Height=0.8mm, Manufacturer_Part_Number=X322525MOB4SI

## Via types
v1: diameter 0.45, hole 0.25, Top Layer to Bottom Layer, 72 vias
v2: diameter 0.55, hole 0.25, Top Layer to Bottom Layer, 1 vias

## Nets (pads, with @x,y where several pads share a name; then routed paths per layer and width w, separated by ;. In a path a pad name is that pad's centre, name@x,y a point inside that pad or via, vN(x,y) a via of type N, cw(c..) or ccw(c..) an arc to the next point about the centre after c; other vN are vias at no path point)
+3.3V: 3.3V.1 C5.1 C6.2 C7.2 C8.2 C9.2 C10.2 C11.2 D2.2 FB1.1 PWR.1 R2.1 R4.1 R6.1 R8.1 R10.1 R12.1 R14.1 R16.1 R18.1 R25.1 R26.1 R29.1 R31.1 R33.2 SW1.3 SWD.1 U1.6 U1.11 U1.27 U1.50 U1.75 U1.100 | length 66.6
  Top Layer w0.25: PWR.1 1.956,41.608 1.956,44.406 2.219,44.669 8.069,44.669 D2.2@8.153,44.753 ; v1@9.52,38.12 v1(9.55,38.151) 10.185,38.786 3.3V.1 ; U1.11@36.692,32.512 U1.11 ; U1.50@50.445,23.309 U1.50 ; U1.75 U1.75@52.645,37.509
  Top Layer w0.3: 35.476,35.009 U1.6 ; 35.687,32.512 U1.11@36.692,32.512 ; 37.973,40.181 38.445,39.709 U1.100 ; U1.27 38.945,22.904 38.989,22.86 ; U1.50@50.445,23.309 51.021,22.733 ; U1.75@52.645,37.509 53.213,38.077
  Top Layer w0.35: C6.2 34.58,32.512 35.687,32.512 ; C7.2@34.544,34.942 34.729,34.757 35.224,34.757 35.476,35.009 ; 37.973,40.181 37.973,40.858 C9.2 ; 38.913,21.336 ccw(c38.729,21.52) 38.989,21.52 C10.2 38.989,22.86 ; 51.021,22.733 51.085,22.669 51.085,22.283 51.27,22.098 C11.2 ; 53.213,38.077 53.815,38.077 C8.2
  Top Layer w0.45: PWR.1 v1@9.52,38.12 ; v1(5.842,58.928) 6.697,58.928 R10.1 ; v1(13.97,60.96) 13.97,59.783 R16.1 ; v1(16.256,42.164) 16.383,42.037 SW1.3 ; R18.1 17.052,52.832 v1(18.034,52.832) ; R12.1 21.971,55.245 v1(22.098,55.118) ; R14.1 25.146,52.832 v1(26.162,52.832) ; v1(27.356,19.533) 27.356,20.917 FB1.1@27.546,21.107 ; v1(27.94,42.418) 27.94,41.661 28.165,41.436 R33.2 ; v1(32.029,54.127) 32.055,54.102 R4.1 ; v1@33.401,32.512 cw(c33.488,32.425) v1(33.488,32.548) C6.2 ; v1@33.528,34.798 cw(c33.571,34.755) v1(33.571,34.816) C7.2 ; v1(36.068,61.722) 36.079,61.711 R2.1 ; v1(36.576,42.672) C5.1 37.731,41.172 37.854,41.049 37.854,41.029 37.989,40.894 C9.2 ; v1(38.659,21.184) ccw(c38.659,21.429) 38.832,21.255 38.913,21.336 ; v1(40.201,61.823) 40.318,61.706 R8.1 ; v1(44.196,55.626) 44.323,55.499 R6.1 ; v1(48.006,54.356) 48.988,54.356 R26.1 ; C11.2 v1(52.324,22.098) ; R25.1 51.943,60.198 v1(52.832,60.198) ; C8.2 53.915,39.098 cw(c54.12,39.098) v1(53.975,39.243) ; v1(56.642,55.372) 56.642,54.093 R31.1 ; v1(59.182,61.722) 59.533,61.371 59.533,60.55 R29.1 ; SWD.1 71.298,41.224 v1(71.374,41.148)
+5V: C14.1 R23.2 USB.1 | length 8.4
  Top Layer w0.25: R23.2@67.773,31.801 R23.2@67.722,31.75 ; C14.1 69.85,29.944 68.777,29.944 67.722,30.999 R23.2@67.722,31.75 ; USB.1 69.506,34.285 67.722,32.501 R23.2@67.722,31.75
B1DS: LED1.1 U1.80 | length 36.2
  Top Layer w0.2: U1.80 48.445,41.266 48.743,41.563 v1(48.743,41.631) ; LED1.1 62.143,62.444 63.246,61.341 v1(63.246,51.435)
  Bottom Layer w0.25: v1(48.743,41.631) 56.54,49.428 62.001,49.428 63.246,50.673 v1(63.246,51.435)
B1SHCP: LED1.2 U1.79 | length 36.8
  Top Layer w0.2: U1.79 48.945,40.817 v1(49.911,41.783) ; v1(64.643,52.197) LED1.2
  Bottom Layer w0.25: v1(49.911,41.783) 55.88,47.752 62.484,47.752 64.643,49.911 v1(64.643,52.197)
B1STCP: LED1.3 U1.78 | length 38.8
  Top Layer w0.2: U1.78 49.445,40.174 v1(50.8,41.529) ; v1(66.167,53.34) 66.167,60.96 67.143,61.936 LED1.3
  Bottom Layer w0.25: v1(50.8,41.529) 56.21,46.939 64.846,46.939 66.167,48.26 v1(66.167,53.34)
B2DS: LED2.2 U1.5 | length 35.6
  Top Layer w0.25: LED2.2 5.501,28.251 15.424,28.251 23.876,36.703 34.925,36.703 35.56,36.068 35.56,35.814 35.865,35.509 U1.5
B2SHCP: LED2.3 U1.1 | length 35
  Top Layer w0.25: LED2.3 13.168,30.567 20.955,38.354 34.671,38.354 35.516,37.509 U1.1
B2STCP: LED2.1 TP8.1 U1.2 | length 43.2
  Top Layer w0.25: LED2.1 5.357,25.527 9.086,25.527 ; v1(10.389,26.111) 9.804,25.527 9.086,25.527 ; v1(11.506,29.464) 14.478,29.464 22.606,37.592 34.671,37.592 35.254,37.009 U1.2 ; TP8.1 11.346,23.266 9.086,25.527
  Bottom Layer w0.25: v1(10.389,26.111) 10.389,28.981 10.871,29.464 v1(11.506,29.464)
BOOT: C2.2 R34.2 SW1.2 TP2.1 U1.94 | length 25.6
  Top Layer w0.25: SW1.2 27.305,44.069 31.75,44.069 32.165,43.654 R34.2 ; TP2.1 32.14,42.647 32.113,42.62 C2.2 35.306,41.021 38.862,37.465 41.299,37.465 41.445,37.611 U1.94
D1_CS: LCD1_C.2 U1.36 | length 17.2
  Top Layer w0.25: LCD1_C.2 34.584,14.086 37.033,16.535 41.3,16.535 43.445,18.68 U1.36
D1_D0: LCD1_D.8 U1.38 | length 33.7
  Top Layer w0.25: LCD1_D.8 28.789,9.572 39.925,9.572 44.445,14.092 U1.38
D1_D1: LCD1_D.7 U1.39 | length 32.3
  Top Layer w0.25: LCD1_D.7 26.67,5.264 26.99,5.584 26.99,5.654 30.353,9.017 40.386,9.017 44.945,13.576 U1.39
D1_D2: LCD1_D.6 U1.40 | length 30.3
  Top Layer w0.25: LCD1_D.6 32.599,8.382 40.64,8.382 45.445,13.187 U1.40
D1_D3: LCD1_D.5 U1.41 | length 28.6
  Top Layer w0.25: LCD1_D.5 34.464,7.747 41.021,7.747 45.945,12.671 U1.41
D1_D4: LCD1_D.4 U1.42 | length 26.8
  Top Layer w0.25: LCD1_D.4 36.329,7.112 41.275,7.112 46.445,12.282 U1.42
D1_D5: LCD1_D.3 U1.43 | length 25.2
  Top Layer w0.25: LCD1_D.3 36.67,5.174 36.891,5.174 38.321,6.604 41.783,6.604 46.945,11.766 U1.43
D1_D6: LCD1_D.2 U1.44 | length 23.3
  Top Layer w0.25: LCD1_D.2 40.313,6.096 42.164,6.096 47.445,11.377 U1.44
D1_D7: LCD1_D.1 U1.45 | length 21.9
  Top Layer w0.25: LCD1_D.1 41.901,5.184 42.751,5.184 47.945,10.379 U1.45
D1_RD: LCD1_C.5 U1.33 | length 21.6
  Top Layer w0.25: LCD1_C.5 27.247,12.863 27.247,13.608 32.537,18.898 40.107,18.898 41.945,20.736 U1.33
D1_RS: LCD1_C.3 U1.35 | length 18.8
  Top Layer w0.25: LCD1_C.3 32.084,14.126 35.23,17.272 40.767,17.272 42.945,19.45 U1.35
D1_RST: LCD1_C.1 TP4.1 U1.37 | length 17.9
  Top Layer w0.25: LCD1_C.1 40.691,12.7 43.357,15.366 ; TP4.1 43.307,15.316 43.357,15.366 ; U1.37 43.945,15.954 43.357,15.366
D1_WR: LCD1_C.4 U1.34 | length 20.4
  Top Layer w0.25: LCD1_C.4 29.584,14.166 33.553,18.136 40.361,18.136 42.445,20.22 U1.34
D2_CS: LCD2_C.2 U1.66 | length 26.8
  Top Layer w0.25: U1.66 57.06,33.009 62.713,27.356 62.713,23.774 67.198,19.289 LCD2_C.2
D2_D0: LCD2_D.8 U1.55 | length 27
  Top Layer w0.25: LCD2_D.8 48.721,5.033 54.61,10.922 54.61,26.67 53.771,27.509 U1.55
D2_D1: LCD2_D.7 U1.56 | length 27.4
  Top Layer w0.25: LCD2_D.7 55.372,8.977 55.372,26.797 54.16,28.009 U1.56
D2_D2: LCD2_D.6 U1.57 | length 27.6
  Top Layer w0.25: U1.57 54.422,28.509 56.134,26.797 56.134,7.239 LCD2_D.6
D2_D3: LCD2_D.5 U1.58 | length 27.9
  Top Layer w0.25: U1.58 54.811,29.009 56.896,26.924 56.896,5.671 56.221,4.996 LCD2_D.5
D2_D4: LCD2_D.4 U1.59 | length 29.1
  Top Layer w0.25: U1.59 55.073,29.509 57.832,26.75 57.832,5.715 LCD2_D.4
D2_D5: LCD2_D.3 U1.60 | length 30.9
  Top Layer w0.25: U1.60 55.335,30.009 58.547,26.797 58.547,7.239 60.96,4.826 LCD2_D.3
D2_D6: LCD2_D.2 U1.61 | length 32.5
  Top Layer w0.25: U1.61 55.724,30.509 59.309,26.924 59.309,9.238 LCD2_D.2
D2_D7: LCD2_D.1 U1.62 | length 34.4
  Top Layer w0.25: U1.62 55.986,31.009 59.944,27.051 59.944,10.795 65.352,5.387 65.66,5.387 LCD2_D.1
D2_RD: LCD2_C.5 TP5.1 U1.63 | length 35.6
  Top Layer w0.25: U1.63 56.324,31.509 60.757,27.076 60.757,19.634 68.602,11.789 ; TP5.1 68.598,11.786 68.602,11.789 ; LCD2_C.5 68.602,11.789
D2_RS: LCD2_C.3 U1.65 | length 28.3
  Top Layer w0.25: U1.65 56.772,32.509 62.128,27.153 62.128,22.403 67.742,16.789 LCD2_C.3
D2_RST: LCD2_C.1 U1.67 | length 25.3
  Top Layer w0.25: U1.67 57.372,33.509 63.322,27.559 63.322,25.197 66.73,21.789 LCD2_C.1
D2_WR: LCD2_C.4 U1.64 | length 30.2
  Top Layer w0.25: U1.64 56.612,32.009 61.468,27.153 61.468,20.701 67.88,14.289 LCD2_C.4
DOWN: C27.1 R15.1 U1.92 | length 32.5
  Top Layer w0.25: C27.1 23.009,49.589 R15.1 20.828,48.514 21.971,47.371 39.497,47.371 42.445,44.423 U1.92
DOWN_I: KEY_CON.4 R14.2 R15.2 | length 17.7
  Top Layer w0.25: KEY_CON.4 20.574,64.055 20.574,51.943 R15.2 22.053,51.689 22.919,52.555 R14.2
GND: C1.1 C2.1 C3.2 C4.1 C5.2 C6.1 C7.1 C8.1 C9.1 C10.1 C11.1 C12.2 C13.2 C14.2 C15.1 C16.2 C17.1 C18.2 C19.2 C20.2 C21.2 C22.2 C23.2 C24.2 C25.2 C26.2 C27.2 C28.2 C29.2 C30.2 C31.2 C32.2 GND.1 PWR.2 R20.1 R22.1 R24.1 R34.1 SW1.4 SWD.6 U1.10 U1.19 U1.26 U1.49 U1.74 U1.99 USB.5 Y1.2 Y1.4 | length 95.3
  Top Layer w0.25: v1(9.677,40.64) 9.732,40.64 10.036,40.945 GND.1 ; 35.982,28.534 36.67,28.534 U1.19 ; U1.49@49.92,23.734 U1.49
  Top Layer w0.3: 35.56,28.956 35.982,28.534 ; 35.56,33.274 35.825,33.009 U1.10 ; 38.445,22.951 U1.26 ; U1.99 38.945,40.215 ; 49.92,22.869 U1.49@49.92,23.734 ; U1.74 53.265,37.009 53.265,37.136
  Top Layer w0.35: C6.1 35.306,33.528 35.56,33.274 ; C15.1 34.907,28.956 35.56,28.956 ; C10.1 37.973,22.007 37.973,22.479 38.445,22.951 ; 38.945,40.215 38.945,40.85 C9.1 ; 49.92,22.869 50.105,22.685 50.105,22.283 50.29,22.098 C11.1 ccw(c52.492,22.098) 50.949,20.555 C13.2 ; 53.265,37.136 C8.1@53.874,37.136 ; C8.1 54.1,37.401 54.737,37.662 54.737,38.663 55.115,39.148 55.232,39.265 55.421,39.265 C12.2
  Top Layer w0.45: v1(2.032,49.428) 2.159,49.555 R20.1 ; v1(4.826,56.388) C25.2 ; PWR.2 9.657,40.62 v1(9.677,40.64) ; v1(13.462,55.372) 13.462,56.632 13.726,56.896 14.441,56.896 C28.2 ; v1(16.425,39.37) 17.526,39.37 SW1.4 ; C30.2 17.055,50.114 18.288,48.881 v1(18.288,48.26) ; C18.2 20.879,24.395 v2(20.879,26.213) ; C27.2 25.564,50.038 v1(27.178,50.038) ; v1(26.06,32.588) 26.072,32.6 Y1.4 ; C26.2 26.701,56.775 26.701,55.595 v1(26.924,55.372) ; v1(26.822,28.245) 26.833,28.255 C4.1 ; v1(28.677,35.154) 28.677,34.478 28.71,34.445 28.71,34.425 28.845,34.29 C3.2 ; v1(28.956,42.926) 29.84,42.926 R34.1@30.065,42.701 ; Y1.2 30.695,30.9 v1(30.709,30.886) ; R34.1 30.065,41.285 30.329,41.021 C2.1 ; C1.1 32.182,39.37 v1(32.385,39.167) ; C19.2 ccw(c33.197,23.923) 33.197,23.673 v1(34.671,23.673) ; C19.2@33.02,23.819 33.301,24.1 33.374,24.1 33.404,24.13 34.153,24.13 34.663,24.64 34.663,25.555 C17.1 ; C16.2 33.02,29.456 33.411,29.065 C15.1 v1(34.798,30.063) cw(c34.885,30.063) v1@34.823,30.124 ; v1(33.172,49.657) 33.186,49.671 C22.2 ; v1(33.528,33.528) C6.1 ; v1@33.528,35.814 ccw(c33.571,35.857) v1(33.571,35.796) C7.1 ; C21.2 36.576,57.404 v1(36.576,55.88) ; v1(37.084,21.946) 37.948,21.946 ccw(c37.948,22.032) C10.1 ; v1(38.608,43.942) 38.608,43.345 39.231,42.722 C5.2 39.37,42.533 39.37,41.255 39.009,40.894 C9.1 ; C24.2 40.566,56.208 v1(40.64,56.134) ; v1(44.45,49.276) C23.2 ; v1(47.244,51.562) C29.2 ; v1(50.19,9.754) 50.216,9.779 50.216,11.248 R22.1@50.292,11.324 ; C13.2 v1(52.705,20.32) ; C20.2 52.578,57.441 v1(52.578,56.134) ; v1(55.626,49.53) 55.626,50.151 56.859,51.384 C32.2 ; C12.2 cw(c56.209,38.725) 56.209,39.37 v1(57.277,39.37) ; C31.2 59.51,56.06 v1(59.69,55.88) ; R24.1@66.04,25.879 68.46,25.879 69.375,26.794 C14.2 70.2,25.711 v1(70.231,25.679) ; v1(69.088,36.779) 69.194,36.885 USB.5 ; SWD.6 71.298,60.63 v1(71.374,60.706)
K_C1: C20.1 R27.1 U1.84 | length 21.8
  Top Layer w0.25: U1.84 46.445,56.721 47.45,57.726 R27.1 50.069,57.726 C20.1
K_C1_I: KEY_C.1 R25.2 R27.2 | length 8.8
  Top Layer w0.25: KEY_C.1 47.11,60.315 47.125,60.301 47.125,60.151 47.45,59.826 R27.2 47.75,59.826 48.376,60.452 49.589,60.452 R25.2
K_C2: C29.1 R28.1 U1.83 | length 16.6
  Top Layer w0.25: U1.83 46.945,44.913 50.775,48.743 C29.1 52.47,51.562 53.114,50.918 R28.1
K_C2_I: KEY_C.2 R26.2 R28.2 | length 17.7
  Top Layer w0.25: KEY_C.2 53.848,61.675 53.848,53.603 53.739,53.493 53.739,53.343 53.414,53.018 R28.2 53.114,53.018 52.789,53.343 52.789,53.493 51.977,54.305 R26.2
K_C3: C31.1 R30.1 U1.82 | length 23.8
  Top Layer w0.25: U1.82 47.445,43.254 54.991,50.8 54.991,56.828 R30.1 55.395,57.082 56.149,57.836 C31.1
K_C3_I: KEY_C.3 R29.2 R30.2 | length 10.8
  Top Layer w0.25: KEY_C.3 52.22,65.913 57.658,60.475 R29.2 56.538,60.325 55.395,59.182 R30.2
K_C4: C32.1 R32.1 U1.81 | length 22.8
  Top Layer w0.25: U1.81 47.945,42.865 53.594,48.514 58.837,48.514 R32.1@61.064,50.741 ; C32.1 60.37,51.435 R32.1@61.064,50.741 ; R32.1 R32.1@61.064,50.741
K_C4_I: KEY_C.4 R31.2 R32.2 | length 19.7
  Top Layer w0.25: KEY_C.4 56.261,65.913 61.214,60.96 R32.2 59.845,52.841 58.886,53.8 R31.2
K_R1: C21.1 R3.1 U1.88 | length 31.9
  Top Layer w0.25: C21.1 33.717,57.209 R3.1 31.854,57.209 31.529,56.884 31.529,56.734 30.988,56.193 30.988,49.041 31.134,48.895 40.259,48.895 44.445,44.709 U1.88
K_R1_I: KEY_R.1 R2.2 R3.2 TP3.1 | length 14.5
  Top Layer w0.25: TP3.1 31.87,66.167 KEY_R.1 32.124,59.429 R3.2 32.154,59.309 33.119,60.274 R2.2
K_R2: C22.1 R5.1 U1.87 | length 18.8
  Top Layer w0.25: C22.1 36.748,51.46 37.315,50.893 R5.1 37.504,50.854 37.504,50.214 38.061,49.657 40.513,49.657 44.945,45.225 U1.87
K_R2_I: KEY_R.2 R4.2 R5.2 | length 17.4
  Top Layer w0.25: KEY_R.2 37.973,62.564 37.973,53.501 37.94,53.468 37.94,53.318 37.615,52.993 R5.2 37.315,52.993 36.206,54.102 R4.2
K_R3: C23.1 R7.1 U1.86 | length 16.3
  Top Layer w0.25: R7.1 R7.1@40.409,50.893 ; C23.1 40.951,51.435 R7.1@40.409,50.893 ; U1.86 45.445,45.487 40.734,50.198 40.734,50.568 R7.1@40.409,50.893
K_R3_I: KEY_R.3 R6.2 R7.2 | length 17.1
  Top Layer w0.25: KEY_R.3 38.862,64.175 38.862,54.39 39.784,53.468 39.784,53.318 40.109,52.993 R7.2 40.386,53.12 40.386,53.721 40.767,54.102 R6.2
K_R4: C24.1 R9.1 U1.85 | length 21.4
  Top Layer w0.25: C24.1 43.885,58.166 44.681,57.37 R9.1 44.981,57.37 45.945,56.406 U1.85
K_R4_I: KEY_R.4 R8.2 R9.2 | length 11.5
  Top Layer w0.25: KEY_R.4 44.831,60.706 R9.2 44.681,59.47 43.572,60.579 R8.2
LEFT: C28.1 R17.1 U1.93 | length 40
  Top Layer w0.25: C28.1 16.547,57.099 17.149,56.497 17.874,56.497 17.88,56.492 17.903,56.515 R17.1 19.05,49.022 21.463,46.609 39.243,46.609 41.945,43.907 U1.93
LEFT_I: KEY_CON.3 R16.2 R17.2 | length 9.5
  Top Layer w0.25: KEY_CON.3 16.216,59.637 R16.2 17.952,59.563 18.9,58.615 R17.2
NetC3_1: C3.1 U1.12 Y1.3 | length 9.9
  Top Layer w0.2: Y1.3 29.845,32.897 C3.1 30.607,34.29 33.274,31.623 35.177,31.623 35.563,32.009 U1.12
NetC4_2: C4.2 U1.13 Y1.1 | length 11.7
  Top Layer w0.2: Y1.1 27.813,30.435 C4.2 29.972,29.21 31.877,31.115 35.306,31.115 35.7,31.509 U1.13
NetC12_1: C12.1 U1.73 | length 4
  Top Layer w0.25: U1.73 54.808,36.509 55.753,37.454 C12.1
NetC13_1: C13.1 U1.48 | length 3.7
  Top Layer w0.25: 49.445,22.699 U1.48
  Top Layer w0.35: 49.2,22.25 49.2,22.454 49.445,22.699
  Top Layer w0.45: 49.2,22.25 49.2,20.601 49.481,20.32 C13.1
NetC15_2: C15.2 C16.1 R1.2 U1.20 | length 7.4
  Top Layer w0.3: 35.756,28.009 U1.20
  Top Layer w0.35: C15.2 34.874,28.009 35.756,28.009
  Top Layer w0.45: R1.2@29.845,26.75 30.595,26.75 31.72,27.875 C16.1 33.125,27.98 34.693,27.98 C15.2
NetC17_2: C17.2 C19.1 FB1.2 R1.1 U1.21 | length 12
  Top Layer w0.25: U1.21@36.67,27.484 U1.21
  Top Layer w0.3: 35.687,27.305 35.866,27.484 U1.21@36.67,27.484
  Top Layer w0.35: C17.2@34.798,26.69 35.413,27.305 35.687,27.305
  Top Layer w0.45: FB1.2@29.082,21.336 29.082,23.342 29.536,23.796 R1.1@29.845,23.796 ; R1.1@29.687,23.954 29.687,24.886 29.972,25.171 32.791,25.171 C19.1 ; C19.1@33.02,25.473 34.062,26.515 34.663,26.515 34.798,26.65 C17.2
NetD2_1: D2.1 R20.2 | length 5
  Top Layer w0.25: R20.2 7.62,49.555 8.204,48.971 D2.1
NetD3_1: D3.1 R22.2 | length 2.7